# Altium PCB PCB2.PcbDoc (part 1 of 2)
Units mil, origin at the board's own origin, x right, y up, seen from the top; angles counter-clockwise.
Board outline 5560 x 2585 mil, 4 copper layers (L1, L2, L3, L4), stack 23.756 mil thick; 155 components, 55 nets, 355 pads, 375 vias.
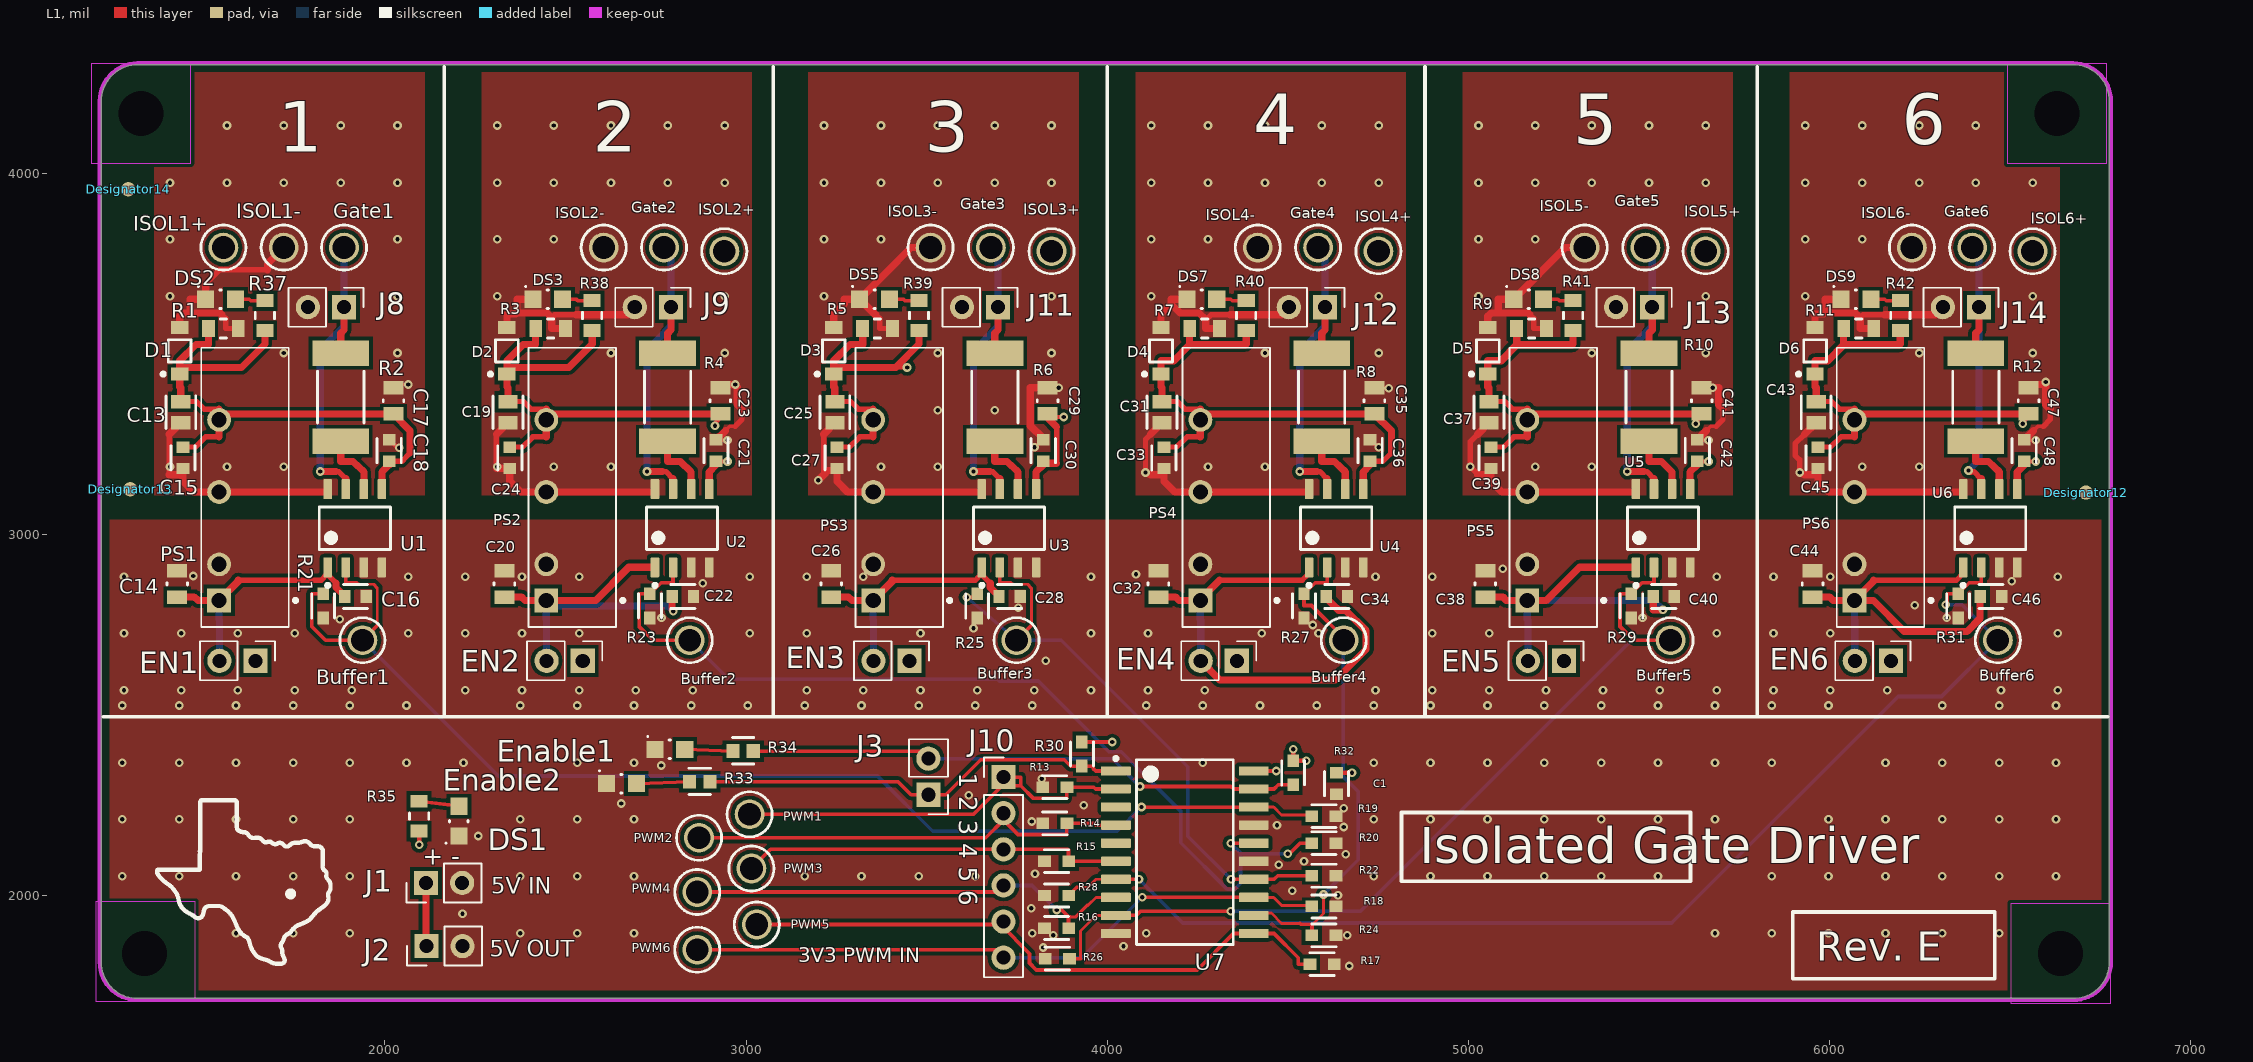
[diagram p0: L1 view]
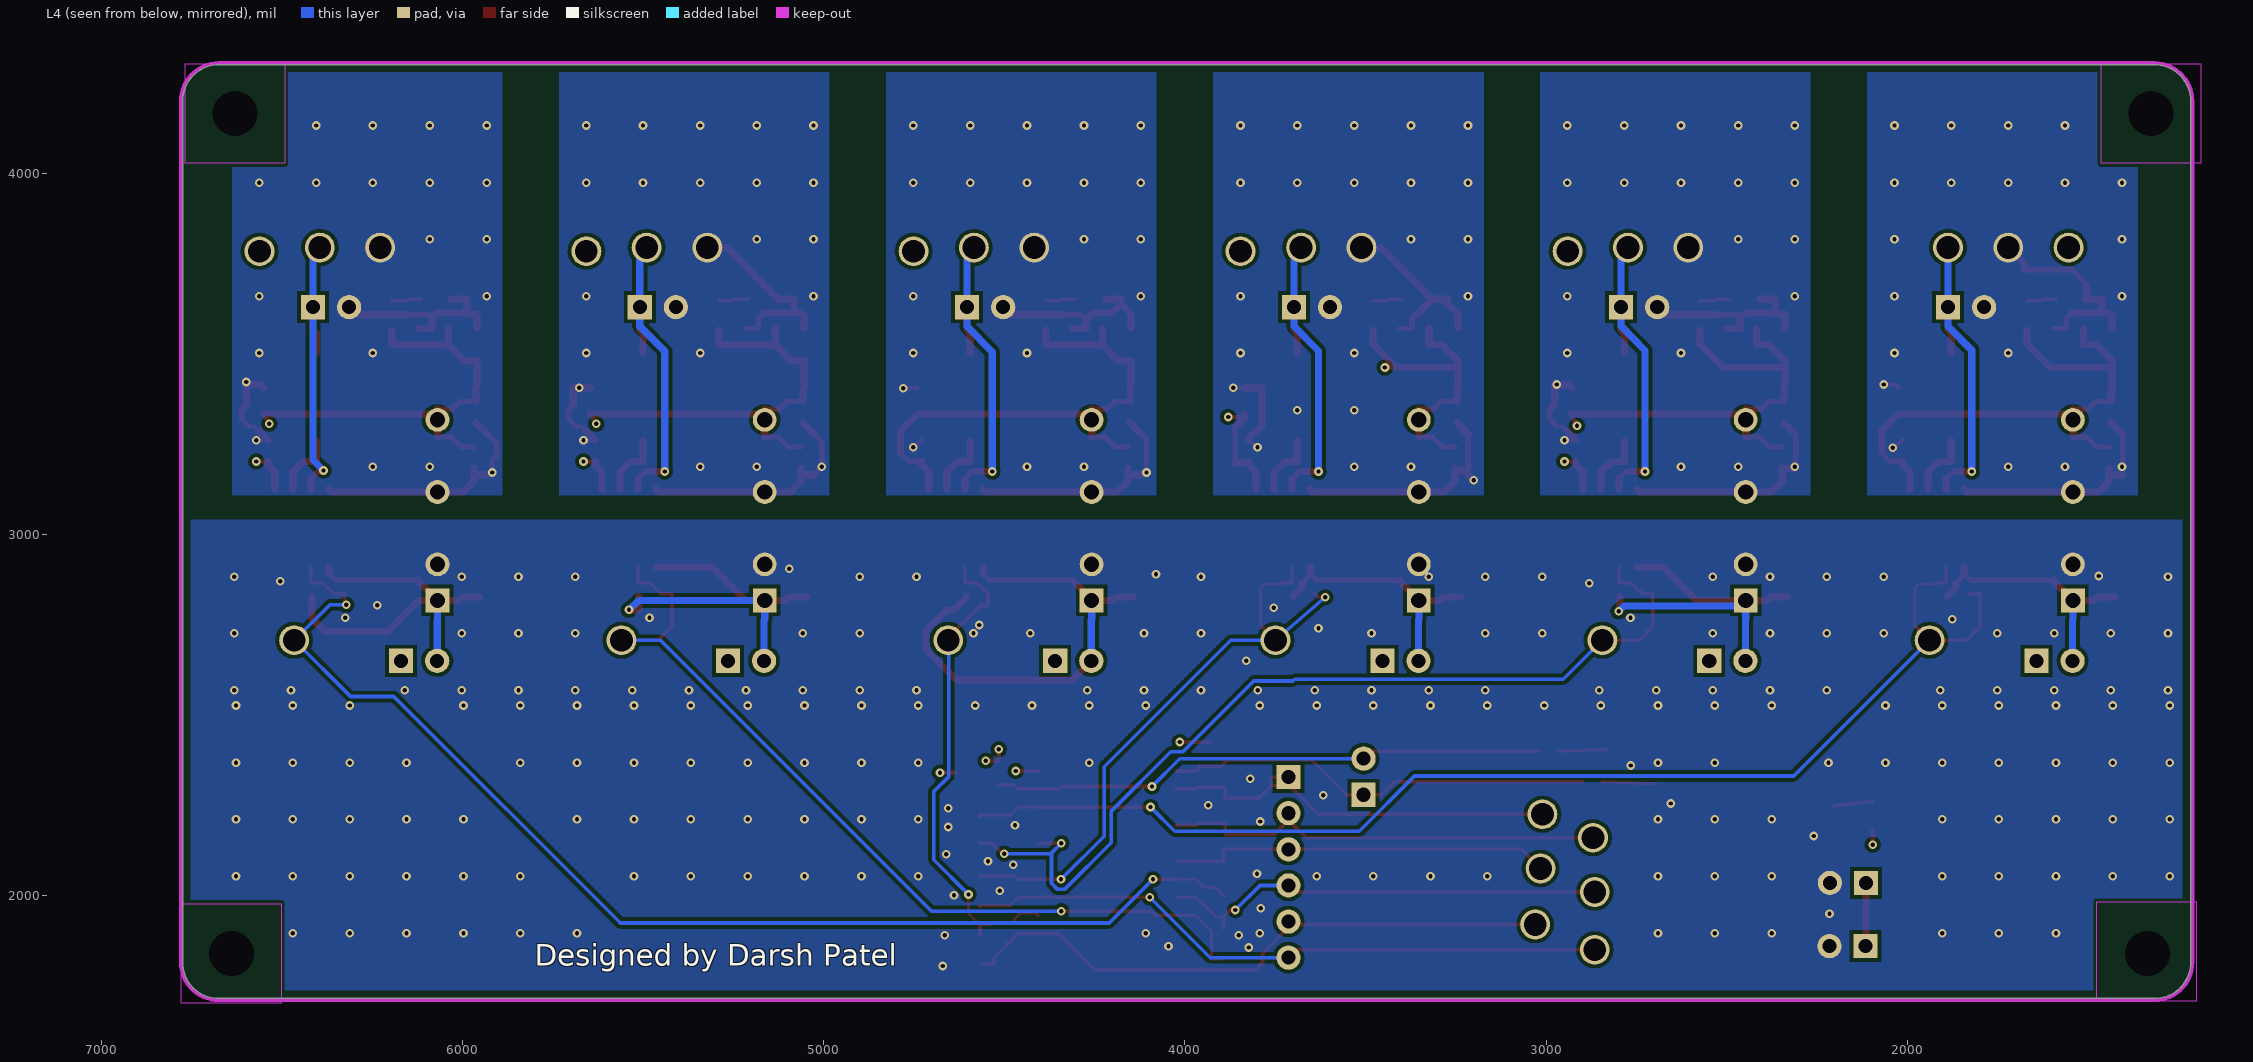
[diagram p1: L4 view, seen from below]
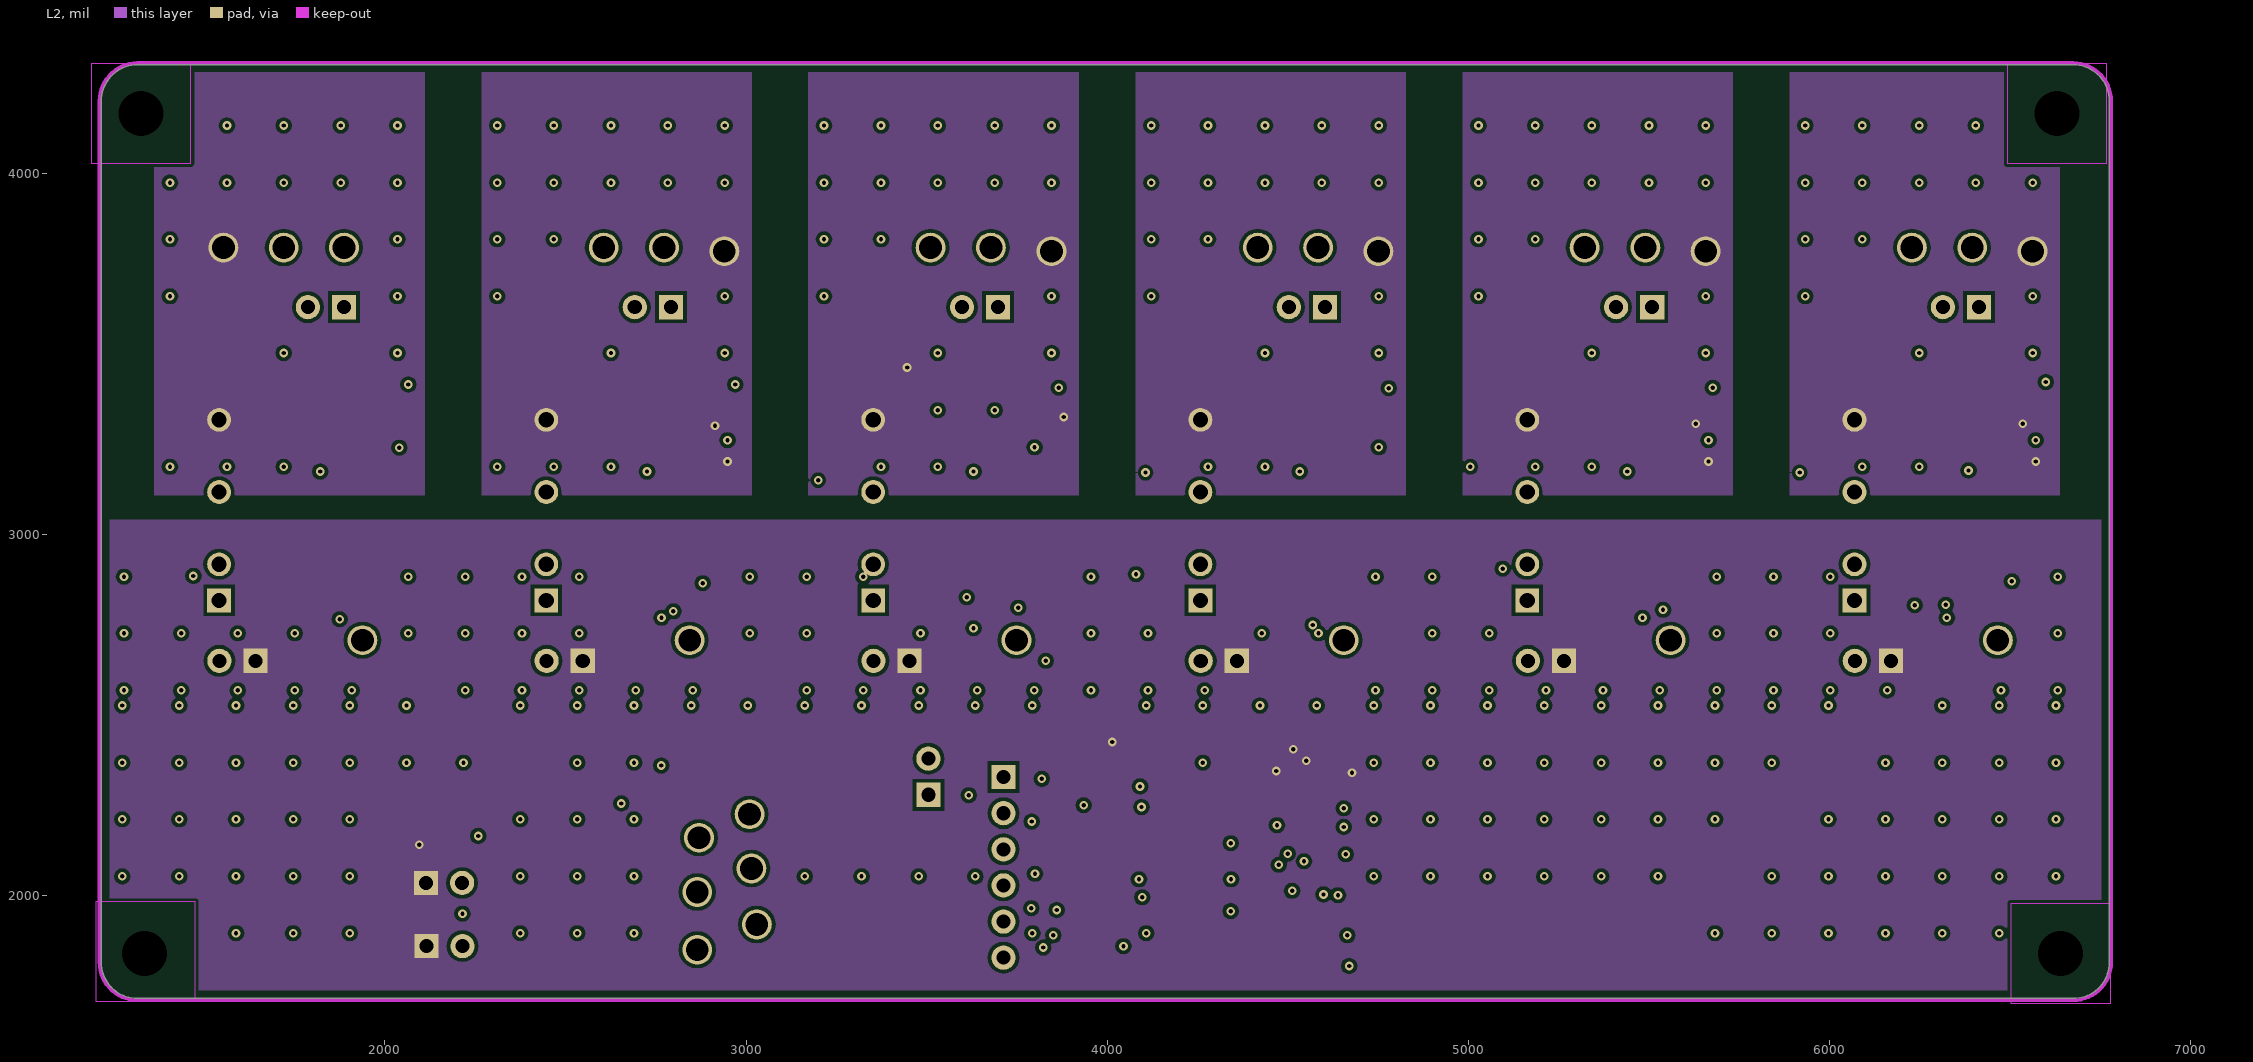
[diagram p2: L2]
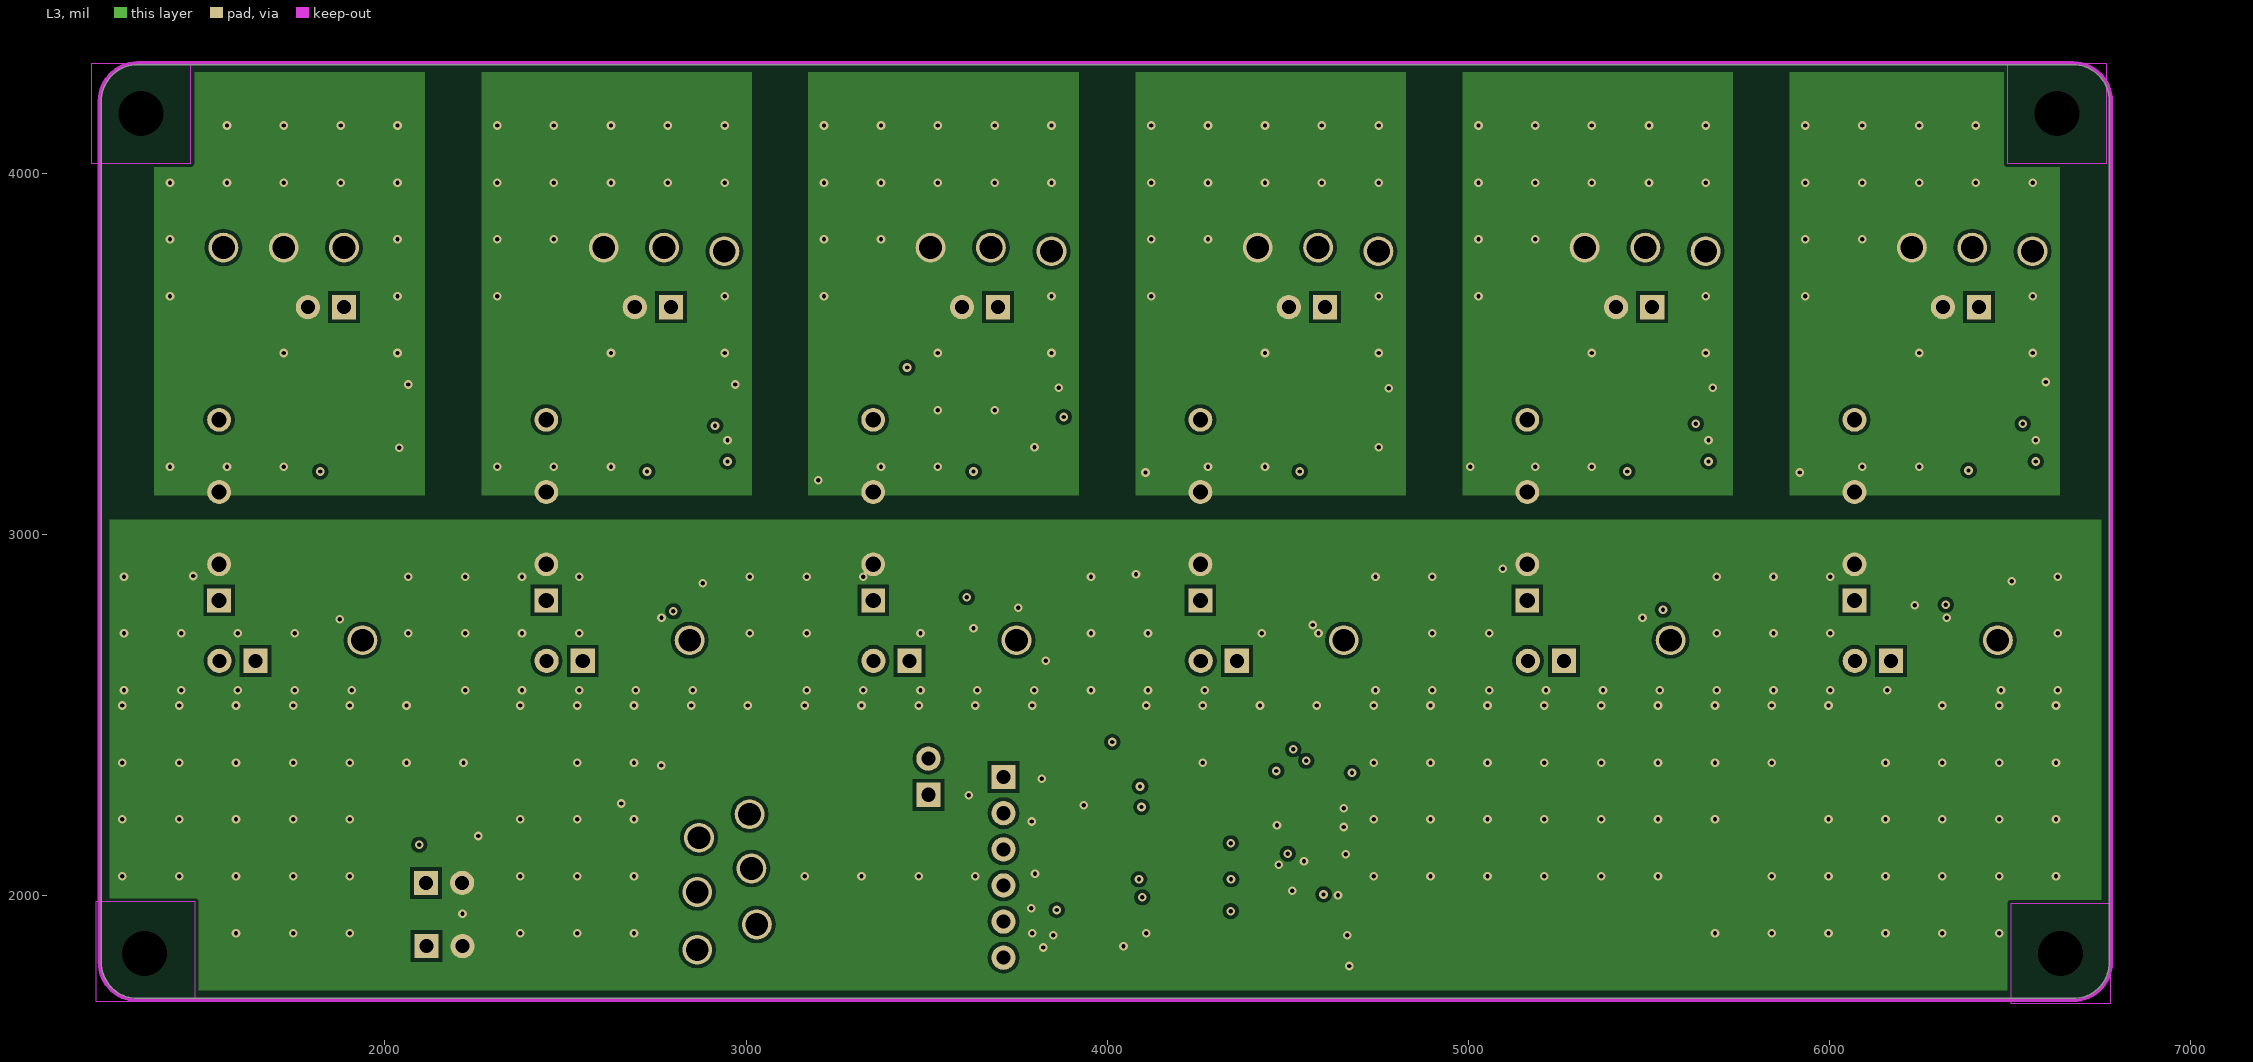
[diagram p3: L3]
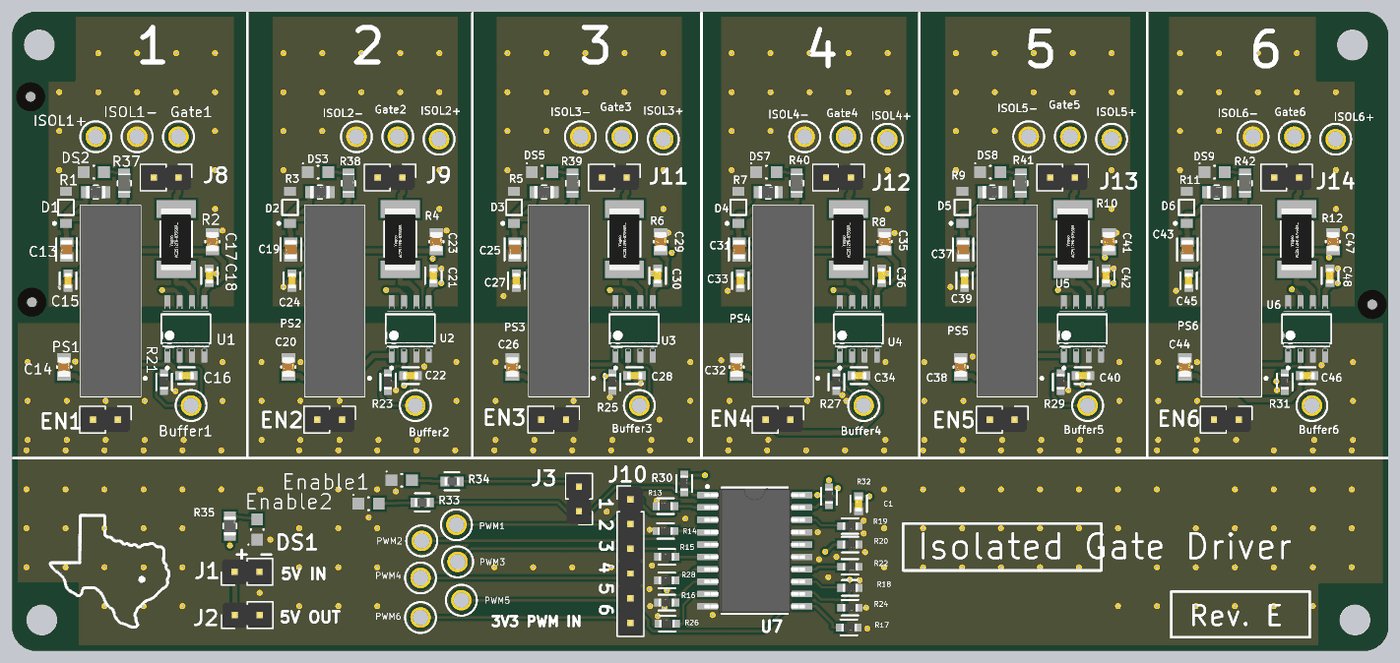
[diagram p4: 3D render of the assembled board from above, using the file's embedded part models]

## Layer stack, top to bottom
Top Solder: solder mask 0.4, Solder Resist, Dk 3.5
L1: signal copper 1.378
Dielectric 2: prepreg 2.8, PP-006, Dk 4.1
L2: signal copper 1.4
Dielectric 1: dielectric 12.6, FR-4, Dk 4.8
L3: signal copper 1.4
Dielectric 3: prepreg 2.8, PP-006, Dk 4.1
L4: signal copper 1.378
Bottom Solder: solder mask 0.4, Solder Resist, Dk 3.5

## Board outline
1315,1715 6675,1715 ccw(c6675,1815) 6775,1815 6775,4200 ccw(c6675,4200) 6675,4300 1315,4300 ccw(c1315,4200) 1215,4200 1215,1815 ccw(c1315,1815)

## Design rules (kind name [scope] priority, off if disabled: settings)
Clearance KiCad_Polygon_Clearance [IsPolygon Or InPolygon] p1: gap=10 ignorepadtopadclearanceinfootprint=FALSE
Clearance KiCad_Routing_Clearance [Not IsPolygon And Not InPolygon vs Not IsPolygon And Not InPolygon] p2: gap=7.87 ignorepadtopadclearanceinfootprint=FALSE // Copied KiCad proposal netclass clearance; pour clearance uses separate rule.
Clearance [All] p3: gap=10 ignorepadtopadclearanceinfootprint=FALSE except(5: THPad-THPad)
HoleSize MountingHoleSize [IsPad And (PadIsPlated = 'False')] p1: absolutevalues=TRUE maxlimit=125 minlimit=125 maxpercent=80.000 minpercent=20.000 // Existing four 3.175 mm unplated mounting holes.
HoleSize [IsVia Or (IsPad And (PadIsPlated = 'True'))] p2: absolutevalues=TRUE maxlimit=100 minlimit=1 maxpercent=80.000 minpercent=20.000 // Plated pad and via drills; 3.175 mm NPTH mounts have a separate exact-size rule.
PolygonConnect [All] p1: connectstyle=Direct reliefconductorwidth=10 reliefentries=4 polygonreliefangle="90 Angle" airgapwidth=10
RoutingVias [All] p1: holewidth=12 width=24 viastyle="Through Hole" minholewidth=12 minwidth=24 maxholewidth=12 maxwidth=24 // Matches copied KiCad 0.6 mm / 0.3 mm vias, rounded to 24 / 12 mil in transfer.
SolderMaskExpansion [Not IsVia] p1: expansion=0 istentingtop=FALSE
SolderMaskExpansion KiCad_Via_Mask [IsVia] p2: expansion=-13 istentingtop=FALSE // Copy KiCad both-side tenting: eliminate mask aperture on 24mil vias with radial contraction greater than the via radius.
SolderMaskExpansion SolderMaskExpansion_1 [All] p3: expansion=0 istentingtop=FALSE
SupplyNets "Schematic Supply Nets_1" [InNet('DGND')] p1: voltage=0.000
SupplyNets "Schematic Supply Nets" [InNet('5V')] p2: voltage=0.000
Width Width_2 [All] p1: maxlimit=30 minlimit=8 preferedwidth=10 minimp=50.000000 maximp=50.000000 favimp=50.000000 // Minimum matches KiCad 0.2mm routes after integer-mil transfer.
Width Width_1 [InNet('DGND')] p2: maxlimit=25 minlimit=10 preferedwidth=10 toplayer_minwidth=15 toplayer_prefwidth=20 midlayer1_maxwidth=10 midlayer2_maxwidth=10 bottomlayer_maxwidth=10 minimp=50.000000 maximp=50.000000 favimp=50.000000
Width [InNet('5V')] p3: maxlimit=20 minlimit=10 preferedwidth=10 toplayer_prefwidth=20 midlayer1_maxwidth=10 midlayer2_maxwidth=10 bottomlayer_maxwidth=10 minimp=50.000000 maximp=50.000000 favimp=50.000000
29 further rules are at their usual default settings.

## Components (designator, comment, footprint, x,y, rotation, side; value= is the part's Value field where it differs from the comment)
Buffer1 "5012" KSTN-5012_V 1938,2707 r0 top (schematic designator TP3)
Buffer2 "5012" KSTN-5012_V 2844,2707 r0 top (schematic designator TP4)
Buffer3 "5012" KSTN-5012_V 3749,2707 r0 top (schematic designator TP5)
Buffer4 "5012" KSTN-5012_V 4655,2707 r0 top (schematic designator TP6)
Buffer5 "5012" KSTN-5012_V 5560,2707 r0 top (schematic designator TP7)
Buffer6 "5012" KSTN-5012_V 6466,2707 r0 top (schematic designator TP8)
C1 "CC0603MRX7R8BB104" FP-CC0603-DA-MFG 4635,2310 r270 top value="100 nF"
C13 "C0805C475K3RACAUTO" FP-C0805C475K3RACAUTO-MFG 1435,3338 r270 top
C14 "CC0805KFX7R8BB105" FP-CC0805-0_85-MFG 1425,2863 r90 top value="1 uF"
C15 "CC0603MRX7R8BB104" FP-CC0603-DA-MFG 1441,3212 r270 top value="100 nF"
C16 "CC0603MRX7R8BB104" FP-CC0603-DA-MFG 1919,2828 r0 top value="100 nF"
C17 "CC0805KFX7R8BB105" FP-CC0805-0_85-MFG 2024,3370 r90 top value="1 uF"
C18 "CC0603MRX7R8BB104" FP-CC0603-DA-MFG 2012,3232 r90 top value="100 nF"
C19 "C0805C475K3RACAUTO" FP-C0805C475K3RACAUTO-MFG 2341,3338 r270 top
C20 "CC0805KFX7R8BB105" FP-CC0805-0_85-MFG 2331,2863 r90 top value="1 uF"
C21 "CC0603MRX7R8BB104" FP-CC0603-DA-MFG 2917,3232 r90 top value="100 nF"
C22 "CC0603MRX7R8BB104" FP-CC0603-DA-MFG 2825,2828 r0 top value="100 nF"
C23 "CC0805KFX7R8BB105" FP-CC0805-0_85-MFG 2929,3370 r90 top value="1 uF"
C24 "CC0603MRX7R8BB104" FP-CC0603-DA-MFG 2346,3212 r270 top value="100 nF"
C25 "C0805C475K3RACAUTO" FP-C0805C475K3RACAUTO-MFG 3246,3338 r270 top
C26 "CC0805KFX7R8BB105" FP-CC0805-0_85-MFG 3236,2863 r90 top value="1 uF"
C27 "CC0603MRX7R8BB104" FP-CC0603-DA-MFG 3252,3212 r270 top value="100 nF"
C28 "CC0603MRX7R8BB104" FP-CC0603-DA-MFG 3730,2828 r0 top value="100 nF"
C29 "CC0805KFX7R8BB105" FP-CC0805-0_85-MFG 3835,3370 r90 top value="1 uF"
C30 "CC0603MRX7R8BB104" FP-CC0603-DA-MFG 3823,3232 r90 top value="100 nF"
C31 "C0805C475K3RACAUTO" FP-C0805C475K3RACAUTO-MFG 4152,3338 r270 top
C32 "CC0805KFX7R8BB105" FP-CC0805-0_85-MFG 4142,2863 r90 top value="1 uF"
C33 "CC0603MRX7R8BB104" FP-CC0603-DA-MFG 4157,3212 r270 top value="100 nF"
C34 "CC0603MRX7R8BB104" FP-CC0603-DA-MFG 4636,2828 r0 top value="100 nF"
C35 "CC0805KFX7R8BB105" FP-CC0805-0_85-MFG 4740,3370 r90 top value="1 uF"
C36 "CC0603MRX7R8BB104" FP-CC0603-DA-MFG 4728,3232 r90 top value="100 nF"
C37 "C0805C475K3RACAUTO" FP-C0805C475K3RACAUTO-MFG 5057,3338 r270 top
C38 "CC0805KFX7R8BB105" FP-CC0805-0_85-MFG 5047,2863 r90 top value="1 uF"
C39 "CC0603MRX7R8BB104" FP-CC0603-DA-MFG 5063,3212 r270 top value="100 nF"
C40 "CC0603MRX7R8BB104" FP-CC0603-DA-MFG 5541,2828 r0 top value="100 nF"
C41 "CC0805KFX7R8BB105" FP-CC0805-0_85-MFG 5646,3370 r90 top value="1 uF"
C42 "CC0603MRX7R8BB104" FP-CC0603-DA-MFG 5634,3232 r90 top value="100 nF"
C43 "C0805C475K3RACAUTO" FP-C0805C475K3RACAUTO-MFG 5963,3338 r270 top
C44 "CC0805KFX7R8BB105" FP-CC0805-0_85-MFG 5953,2863 r90 top value="1 uF"
C45 "CC0603MRX7R8BB104" FP-CC0603-DA-MFG 5968,3212 r270 top value="100 nF"
C46 "CC0603MRX7R8BB104" FP-CC0603-DA-MFG 6447,2828 r0 top value="100 nF"
C47 "CC0805KFX7R8BB105" FP-CC0805-0_85-MFG 6551,3370 r90 top value="1 uF"
C48 "CC0603MRX7R8BB104" FP-CC0603-DA-MFG 6539,3232 r90 top value="100 nF"
D1 "MMSZ5245CT1G" ONSC-SOD-123-2-425-04_V 1432,3508 r90 top
D2 "MMSZ5245CT1G" ONSC-SOD-123-2-425-04_V 2338,3508 r90 top
D3 "MMSZ5245CT1G" ONSC-SOD-123-2-425-04_V 3243,3508 r90 top
D4 "MMSZ5245CT1G" ONSC-SOD-123-2-425-04_V 4149,3508 r90 top
D5 "MMSZ5245CT1G" ONSC-SOD-123-2-425-04_V 5054,3508 r90 top
D6 "MMSZ5245CT1G" ONSC-SOD-123-2-425-04_V 5960,3508 r90 top
Designator12 "Comment" fiducial 6709.81,3115.63 r180 top
Designator13 "Comment" fiducial 1295,3125 r180 top
Designator14 "Comment" fiducial 1289.81,3955.63 r180 top
DS1 "LTST-C170KGKT" LTST-LTST-C170KGKT-2_V 2205,2206 r90 top
DS2 "LTST-C170KGKT" LTST-LTST-C170KGKT-2_V 1545,3651 r0 top
DS3 "LTST-C170KGKT" LTST-LTST-C170KGKT-2_V 2451,3651 r0 top
DS5 "LTST-C170KGKT" LTST-LTST-C170KGKT-2_V 3356,3651 r0 top
DS7 "LTST-C170KGKT" LTST-LTST-C170KGKT-2_V 4262,3651 r0 top
DS8 "LTST-C170KGKT" LTST-LTST-C170KGKT-2_V 5167,3651 r0 top
DS9 "LTST-C170KGKT" LTST-LTST-C170KGKT-2_V 6073,3651 r0 top
EN1 "TMM-102-03-F-S" PinHeader_1x02_P2.54mm_Vertical 1642,2650 r270 top
EN2 "TMM-102-03-F-S" PinHeader_1x02_P2.54mm_Vertical 2548,2650 r270 top
EN3 "TMM-102-03-F-S" PinHeader_1x02_P2.54mm_Vertical 3453,2650 r270 top
EN4 "TMM-102-03-F-S" PinHeader_1x02_P2.54mm_Vertical 4359,2650 r270 top
EN5 "TMM-102-03-F-S" PinHeader_1x02_P2.54mm_Vertical 5265,2650 r270 top
EN6 "TMM-102-03-F-S" PinHeader_1x02_P2.54mm_Vertical 6170,2650 r270 top
Enable1 "LTST-C170KGKT" LTST-LTST-C170KGKT-2_V 2789,2405 r0 top (schematic designator DS4)
Enable2 "LTST-C170KGKT" LTST-LTST-C170KGKT-2_V 2655,2310 r0 top (schematic designator DS6)
Gate1 "5012" KSTN-5012_V 1720,3794 r0 top (schematic designator TP11)
Gate2 "5012" KSTN-5012_V 2773,3794 r0 top (schematic designator TP13)
Gate3 "5012" KSTN-5012_V 3678,3794 r0 top (schematic designator TP16)
Gate4 "5012" KSTN-5012_V 4584,3794 r0 top (schematic designator TP21)
Gate5 "5012" KSTN-5012_V 5490,3794 r0 top (schematic designator TP27)
Gate6 "5012" KSTN-5012_V 6395,3794 r0 top (schematic designator TP31)
ISOL1+ "5012" KSTN-5012_V 1553,3794 r0 top (schematic designator TP9)
ISOL1- "5012" KSTN-5012_V 1887,3794 r0 top (schematic designator TP10)
ISOL2+ "5012" KSTN-5012_V 2940,3784 r0 top (schematic designator TP12)
ISOL2- "5012" KSTN-5012_V 2606,3794 r0 top (schematic designator TP14)
ISOL3+ "5012" KSTN-5012_V 3846,3784 r0 top (schematic designator TP15)
ISOL3- "5012" KSTN-5012_V 3511,3794 r0 top (schematic designator TP17)
ISOL4+ "5012" KSTN-5012_V 4751,3784 r0 top (schematic designator TP19)
ISOL4- "5012" KSTN-5012_V 4417,3794 r0 top (schematic designator TP22)
ISOL5+ "5012" KSTN-5012_V 5657,3784 r0 top (schematic designator TP25)
ISOL5- "5012" KSTN-5012_V 5322,3794 r0 top (schematic designator TP28)
ISOL6+ "5012" KSTN-5012_V 6562,3784 r0 top (schematic designator TP30)
ISOL6- "5012" KSTN-5012_V 6228,3794 r0 top (schematic designator TP32)
J1 "TMM-102-03-F-S" PinHeader_1x02_P2.54mm_Vertical 2114,2035 r90 top
J2 "TMM-102-03-F-S" PinHeader_1x02_P2.54mm_Vertical 2115,1860 r90 top
J3 "TMM-102-03-F-S" PinHeader_1x02_P2.54mm_Vertical 3505,2279 r180 top
J8 "TMM-102-03-F-S" PinHeader_1x02_P2.54mm_Vertical 1887,3629 r270 top
J9 "TMM-102-03-F-S" PinHeader_1x02_P2.54mm_Vertical 2792,3629 r270 top
J10 "GRPB061VWVN-RC" PinHeader_1x06_P2.54mm_Vertical 3713,2328 r0 top
J11 "TMM-102-03-F-S" PinHeader_1x02_P2.54mm_Vertical 3698,3629 r270 top
J12 "TMM-102-03-F-S" PinHeader_1x02_P2.54mm_Vertical 4603,3629 r270 top
J13 "TMM-102-03-F-S" PinHeader_1x02_P2.54mm_Vertical 5509,3629 r270 top
J14 "TMM-102-03-F-S" PinHeader_1x02_P2.54mm_Vertical 6414,3629 r270 top
PS1 "MER1S0515SC" MER1S0515SC_MFG 1613,3130 r90 top
PS2 "MER1S0515SC" MER1S0515SC_MFG 2519,3130 r90 top
PS3 "MER1S0515SC" MER1S0515SC_MFG 3424,3130 r90 top
PS4 "MER1S0515SC" MER1S0515SC_MFG 4330,3130 r90 top
PS5 "MER1S0515SC" MER1S0515SC_MFG 5235,3130 r90 top
PS6 "MER1S0515SC" MER1S0515SC_MFG 6141,3130 r90 top
PWM1 "5012" KSTN-5012_V 3010,2225 r0 top (schematic designator TP18)
PWM2 "5012" KSTN-5012_V 2870,2160 r0 top (schematic designator TP20)
PWM3 "5012" KSTN-5012_V 3015,2075 r0 top (schematic designator TP23)
PWM4 "5012" KSTN-5012_V 2865,2010 r0 top (schematic designator TP24)
PWM5 "5012" KSTN-5012_V 3030,1920 r0 top (schematic designator TP26)
PWM6 "5012" KSTN-5012_V 2865,1850 r180 top (schematic designator TP29)
R1 "RT0805DRD0775RL" FP-RT0805-MFG 1553,3570 r0 top value=75Ω
R2 "AC2512JK-0739KL" FP-AC2512-MFG 1878,3380 r90 top value=39KΩ
R3 "RT0805DRD0775RL" FP-RT0805-MFG 2459,3570 r0 top value=75Ω
R4 "AC2512JK-0739KL" FP-AC2512-MFG 2783,3380 r90 top value=39KΩ
R5 "RT0805DRD0775RL" FP-RT0805-MFG 3364,3570 r0 top value=75Ω
R6 "AC2512JK-0739KL" FP-AC2512-MFG 3689,3380 r90 top value=39KΩ
R7 "RT0805DRD0775RL" FP-RT0805-MFG 4270,3570 r0 top value=75Ω
R8 "AC2512JK-0739KL" FP-AC2512-MFG 4594,3380 r90 top value=39KΩ
R9 "RT0805DRD0775RL" FP-RT0805-MFG 5175,3570 r0 top value=75Ω
R10 "AC2512JK-0739KL" FP-AC2512-MFG 5500,3380 r90 top value=39KΩ
R11 "RT0805DRD0775RL" FP-RT0805-MFG 6081,3570 r0 top value=75Ω
R12 "AC2512JK-0739KL" FP-AC2512-MFG 6405,3380 r90 top value=39KΩ
R13 "RT0603CRD0710KL" FP-RT0603-MFG 3855,2300 r180 top value=10KΩ
R14 "RT0603CRD0710KL" FP-RT0603-MFG 3855,2200 r180 top value=10KΩ
R15 "RT0603CRD0710KL" FP-RT0603-MFG 3860,2095 r180 top value=10KΩ
R16 "RT0603CRD0710KL" FP-RT0603-MFG 3860,1910 r180 top value=10KΩ
R17 "RT0603CRD0710KL" FP-RT0603-MFG 4595,1810 r0 top value=10KΩ
R18 "RT0603CRD0710KL" FP-RT0603-MFG 4600,1970 r0 top value=10KΩ
R19 "RT0603CRD0710KL" FP-RT0603-MFG 4600,2220 r0 top value=10KΩ
R20 "RT0603CRD0710KL" FP-RT0603-MFG 4600,2145 r0 top value=10KΩ
R21 "RT0603CRD0710KL" FP-RT0603-MFG 1829,2802 r90 top value=10KΩ
R22 "RT0603CRD0710KL" FP-RT0603-MFG 4600,2055 r0 top value=10KΩ
R23 "RT0603CRD0710KL" FP-RT0603-MFG 2734,2802 r90 top value=10KΩ
R24 "RT0603CRD0710KL" FP-RT0603-MFG 4600,1890 r0 top value=10KΩ
R25 "RT0603CRD0710KL" FP-RT0603-MFG 3640,2802 r90 top value=10KΩ
R26 "RT0603CRD0710KL" FP-RT0603-MFG 3862,1825 r180 top value=10KΩ
R27 "RT0603CRD0710KL" FP-RT0603-MFG 4545,2802 r90 top value=10KΩ
R28 "RT0603CRD0710KL" FP-RT0603-MFG 3860,2000 r180 top value=10KΩ
R29 "RT0603CRD0710KL" FP-RT0603-MFG 5451,2802 r90 top value=10KΩ
R30 "RT0603CRD0710KL" FP-RT0603-MFG 3930,2392 r90 top value=10KΩ
R31 "RT0603CRD0710KL" FP-RT0603-MFG 6356,2802 r90 top value=10KΩ
R32 "RT0603CRD0710KL" FP-RT0603-MFG 4515,2340 r90 top value=10KΩ
R33 "CRCW0603220KFKEA" FP-CRCW0603-e3-IPC_B 2872,2315 r180 top
R34 "CRCW0603220KFKEA" FP-CRCW0603-e3-IPC_B 2992,2400 r180 top
R35 "AF0805FR-07150RL" FP-AF0805-MFG 2095,2220 r90 top
R37 "AC0805JR-07680RL" FP-AC0805-MFG 1668,3606 r90 top value=680Ω
R38 "AC0805JR-07680RL" FP-AC0805-MFG 2574,3606 r90 top value=680Ω
R39 "AC0805JR-07680RL" FP-AC0805-MFG 3479,3606 r90 top value=680Ω
R40 "AC0805JR-07680RL" FP-AC0805-MFG 4385,3606 r90 top value=680Ω
R41 "AC0805JR-07680RL" FP-AC0805-MFG 5290,3606 r90 top value=680Ω
R42 "AC0805JR-07680RL" FP-AC0805-MFG 6196,3606 r90 top value=680Ω
U1 "UCC5310MCDR" FP-D0008B-MFG 1917,3017 r90 top
U2 "UCC5310MCDR" FP-D0008B-MFG 2823,3017 r90 top
U3 "UCC5310MCDR" FP-D0008B-MFG 3728,3017 r90 top
U4 "UCC5310MCDR" FP-D0008B-MFG 4634,3017 r90 top
U5 "UCC5310MCDR" FP-D0008B-MFG 5539,3017 r90 top
U6 "UCC5310MCDR" FP-D0008B-MFG 6445,3017 r90 top
U7 "SN74AHCT244QDWR" DW0020A_M 4215,2120 r0 top

## Footprints (in the part's own frame and the unit in brackets; to place one, negate y for a bottom-side part, rotate by r counter-clockwise, add the part's x,y. Pads: shape width x height; smd on the part's side, far side on the other; paste and mask are expansions set on the pad)
DW0020A_M [mm] "SOIC, 20-Leads, Body 13x7.6mm, Pitch 1.27mm, IPC Low Density"
  rrect15% 2.1x0.65 smd: 1(-4.85,5.715) 2(-4.85,4.445) 3(-4.85,3.175) 4(-4.85,1.905) 5(-4.85,0.635) 6(-4.85,-0.635) 7(-4.85,-1.905) 8(-4.85,-3.175) 9(-4.85,-4.445) 10(-4.85,-5.715) 11(4.85,-5.715) 12(4.85,-4.445) 13(4.85,-3.175) 14(4.85,-1.905) 15(4.85,-0.635) 16(4.85,0.635) 17(4.85,1.905) 18(4.85,3.175) 19(4.85,4.445) 20(4.85,5.715)
  silkscreen extent -4.97,-6.5 3.4,6.71, body extent -5.16,-6.4 5.16,6.4, height 2.52
fiducial [mm]
  round 1 smd mask+1: 1(0,0)
  oval 0x6.096 smd: 15(-0.005,0.016)
FP-AC0805-MFG [mm]
  rect 0.9x1.2 smd paste+0 mask+0: 1(-1.05,0) 2(1.05,0)
  silkscreen extent -0.23,-0.67 0.23,0.67, body extent -1.6,-0.77 1.6,0.77, height 0.25
FP-AC2512-MFG [mm]
  rect 1.8x4 smd paste+0 mask+0: 1(-3.1,0) 2(3.1,0)
  silkscreen extent -1.82,-1.62 1.82,1.62, body extent -4.1,-2.1 4.1,2.1, height 0.25
FP-AF0805-MFG [mm]
  rect 0.9x1.2 smd paste+0 mask+0: 1(-1.05,0) 2(1.05,0)
  silkscreen extent -0.23,-0.67 0.23,0.67, body extent -1.6,-0.77 1.6,0.77, height 0.25
FP-C0805C475K3RACAUTO-MFG [mm]
  rect 0.95x1.35 smd paste+0 mask+0: 1(-0.75,0) 2(0.75,0)
  silkscreen extent -1.15,-1.05 1.15,1.05, body extent -1.4,-0.85 1.4,0.85, height 0.25
FP-CC0603-DA-MFG [mm]
  rect 0.8x0.9 smd paste+0 mask+0: 1(-0.75,0) 2(0.75,0)
  silkscreen extent -0.85,-0.85 0.85,0.85, body extent -1.35,-0.75 1.35,0.75, height 0.25
FP-CC0805-0_85-MFG [mm]
  rect 0.95x1.4 smd paste+0 mask+0: 1(-0.925,0) 2(0.925,0)
  silkscreen extent -0.07,-0.73 0.07,0.73, body extent -1.6,-1.05 1.6,1.05, height 0.25
FP-CRCW0603-e3-IPC_B [mil]
  rect 36.81x37.88 smd paste+0 mask+0: 1(-28.17,0) 2(28.17,0)
  silkscreen extent -30,-37 30,35, body extent -56,-29 56,29, height 10
FP-D0008B-MFG [mm]
  rrect17% 1.4x0.6 smd paste+0 mask+0: 1(-2.75,1.905) 2(-2.75,0.635) 3(-2.75,-0.635) 4(-2.75,-1.905) 5(2.75,-1.905) 6(2.75,-0.635) 7(2.75,0.635) 8(2.75,1.905)
  silkscreen extent -4.14,-2.5 1.5,2.5, body extent -3.55,-2.75 3.55,2.75, height 0.25
FP-RT0603-MFG [mm]
  rect 0.9x0.8 smd paste+0 mask+0: 1(-0.85,0) 2(0.85,0)
  silkscreen extent -0.85,-0.81 0.86,0.8, body extent -1.4,-0.55 1.4,0.55, height 0.25
FP-RT0805-MFG [mm]
  rect 0.9x1.2 smd paste+0 mask+0: 1(-1.05,0) 2(1.05,0)
  silkscreen extent -0.22,-0.67 0.22,0.67, body extent -1.6,-0.77 1.6,0.77, height 0.25
KSTN-5012_V [mm] "Test Point, Dia 3.17mm"
  round 2.1 hole 1.6: 1(0,0)
  silkscreen extent -1.59,-1.58 1.59,1.58, body extent -1.59,-1.59 1.59,1.59, height 8.13
LTST-LTST-C170KGKT-2_V [mm] "SMD, 2-Leads, Body 2.00x1.25mm"
  rect 1.2x1.2 smd: 1(-1.05,0) 2(1.05,0)
  silkscreen extent -1.6,-0.65 0.05,0.95, body extent -1,-0.63 1,0.63, height 1.1
MER1S0515SC_MFG [mm] "Recommended Land Pattern"
  rect 1.675x1.675 hole 1.075: 1(-7.945,1.825)
  round 1.675 hole 1.075: 2(-5.405,1.825) 4(-0.325,1.825) 6(4.755,1.825)
  silkscreen extent -9.82,-3.68 9.83,3.07, body extent -9.82,-3.08 9.82,3.08, height 10.15
ONSC-SOD-123-2-425-04_V [mm] "SOD, 2-Leads, Body 2.69x1.6mm"
  rect 0.91x1.22 smd: 1(-1.635,0) 2(1.635,0)
  silkscreen extent -1.76,-0.8 0.78,1.28, body extent -1.35,-0.8 1.35,0.8, height 1.35
PinHeader_1x02_P2.54mm_Vertical [mil] "PinHeader_1x02_P2.54mm_Vertical"
  rect 67x67 hole 39: 1(0,0)
  round 67 hole 39: 2(0,-100)
  silkscreen extent -54,-154 54,54, body extent -50,-150 50,50, height 336
PinHeader_1x06_P2.54mm_Vertical [mil] "PinHeader_1x06_P2.54mm_Vertical"
  rect 67x67 hole 39: 1(0,0)
  round 67 hole 39: 2(0,-100) 3(0,-200) 4(0,-300) 5(0,-400) 6(0,-500)
  silkscreen extent -54,-554 54,54, body extent -50,-550 50,50, height 336

## Part data
Buffer1 Buffer2 Buffer3 Buffer4 Buffer5 Buffer6 Gate1 Gate2 Gate3 Gate4 Gate5 Gate6 ISOL1+ ISOL1- ISOL2+ ISOL2- ISOL3+ ISOL3- ISOL4+ ISOL4- ISOL5+ ISOL5- ISOL6+ ISOL6- PWM1 PWM2 PWM3 PWM4 PWM5 PWM6: library part CMP-1672-00004-4, "Test Point, White, Through Hole, RoHS, Bulk", Colour=White, Manufacturer=Keystone, Package Quantity=100, ComponentLink1Description="Manufacturer URL", ComponentLink1URL=http://www.keyelco.com/, ComponentLink2Description=Datasheet, ComponentLink2URL=http://www.keyelco.com/product-pdf.cfm?p=1321, Contact Material=Bronze, Contact Plating=Silver, DatasheetVersion="Rev. F, 12/2013", Height="8.12 mm", Length="11.3 mm", Mount="Through Hole", Mounting Technology="Through Hole", PackageDescription="1-Pin Through Hole Device, Dia 3.17 mm", PackageReference=5012, Packaging=Bulk, Pins=1, REACH SVHC="No SVHC", RoHSCompliant=true
C1 C15 C16 C18 C21 C22 C24 C27 C28 C30 C33 C34 C36 C39 C40 C42 C45 C46 C48: library part CMP-03422-001021-1, "CAP CER 0.1UF 25V X7R 0603", Capacitance="100 nF", Manufacturer=YAGEO, Package=CC0603-DA, Temperature="-55°C to +125°C", Temperature Characteristic=X7R, Temperature Coefficient=15%, Temperature Range High=+125°C, Temperature Range Low=-55°C, Tolerance=0.2, Voltage="25 V", Automotive=No, Category=Cap, ComponentLink2Description=Datasheet, ComponentLink2URL=http://www.yageo.com/documents/recent/UPY-GPHC_X7R_6.3V-to-50V_18.pdf, Device Class L1="Passive Components", Device Class L2=Capacitors, Device Class L3="Ceramic Capacitors", Digikey Description="CAP CER 0.1UF 25V X7R 0603", Footprint Url=http://www.yageo.com/exep/pages/download/literatures/UPY-C_GEN_24.pdf, Height=0.9mm, Lead Free=Yes, Manufacturer Part Number=CC0603MRX7R8BB104, Material=Ceramic, Mouser Description="Multilayer Ceramic Capacitors MLCC - SMD/SMT 100nF 25V X7R 20%", Octopart=https://octopart.com/cc0603mrx7r8bb104-yageo-12817663, RoHS=TRUE, Voltage Rating="25 V"
C13 C19 C25 C31 C37 C43: library part CMP-03020-034682-1, "CAP CER 0805 4.7UF 25V X7R  10%", RoHS Compliant=Yes
C14 C17 C20 C23 C26 C29 C32 C35 C38 C41 C44 C47: library part CMP-03422-000373-1, "CC0805 1 uF X7R 10.00% 25 V", Capacitance="1 uF", Manufacturer=Yageo, Package=CC0805-0.85, Temperature="-30°C to +85°C", Temperature Characteristic=X7R, Temperature Range High=+85°C, Temperature Range Low=-30°C, Tolerance=0.1, Voltage Rating="25 V", Automotive=No, Category=Cap, ComponentLink2Description=Datasheet, ComponentLink2URL=http://www.yageo.com/documents/recent/UPY-GPHC_Y5V_6.3V-to-50V_8.pdf, Device Class L1="Passive Components", Device Class L2=Capacitors, Device Class L3="Ceramic Capacitors", Footprint Url=http://www.yageo.com/exep/pages/download/literatures/UPY-C_GEN_24.pdf, Height=0.95mm, Ipc Land Pattern Name=CAPC200125X85, Lead Free=Yes, Manufacturer Part Number=CC0805KFX7R8BB105, Material=Ceramic, Mouser Description="CC Series 0805 1 uF 25 V ±10% Tolerance X7R Multilayer Ceramic Capacitor", Octopart=https://octopart.com/cc0805kfx7r8bb105-yageo-33242303, RoHS=TRUE
D1 D2 D3 D4 D5 D6: library part CMP-1060-00534-1, "Zener Voltage Regulator, 500 mW, 2-Pin SOD-123, Pb-Free, Tape and Reel", Manufacturer="On Semiconductor", ComponentLink1Description="Manufacturer URL", ComponentLink1URL=http://www.onsemi.com/, ComponentLink2Description=Datasheet, ComponentLink2URL=http://www.onsemi.com/pub_link/Collateral/MMSZ5221BT1-D.PDF, ComponentLink3Description="Package Specification", ComponentLink3URL=http://www.onsemi.com/pub_link/Collateral/425-04.PDF, DatasheetVersion="Rev. 12", Mounting Technology="Surface Mount", P Max (W)=0.5, PackageDescription="2-Pin SOD, Body 1.6 x 2.69 mm", PackageReference=SOD-123-2-425-04, PackageVersion="Rev. G, 10/2009", Packing="Tape and Reel", PartNumber=MMSZ5245CT1G, RoHS=Pb-Free, VZ Typ (V)=15
DS1 DS2 DS3 DS5 DS7 DS8 DS9 Enable1 Enable2: library part CMP-2000-06620-1, "Ultra Bright AlInGaP Chip LED, 75 mW, -55 to 85 degC, 2-Pin SMD (0805), RoHS, Tape and Reel", Emitting Color=YellowGreen, Forward Current=30mA, Forward Voltage=2.4V, Manufacturer=Lite-On, Operating Temp Range=-55Cto85C, Operating Temperature Classification=Industrial, Package Description="2-Pin Surface Mounted Device, Body 2 x 1.25 mm", Package Reference=LTST-C170KGKT-2, Package Type=ChipLed, Power Dissipation=75W, Power Dissipation Max=75mW, Reverse Voltage=5V, Test Current (It)=20mA, Chip Material=AlGaInP, Datasheet URL=http://optoelectronics.liteon.com/upload/download/DS22-2000-073/S_110_LTST-C170KGKT.pdf, Datasheet Version="Rev. G, 06/2005", DELETED=Compliant, Dominant Wave Length=571nm, Forward Current Max=30mA, High Brightness=Yes, Lens Dimensions=1.4x1.25x0.6mm, Lum Intensity=35mcd, Luminous Intensity=35mcd, Main Category=ChipLED, Manufacturer URL=http://www.us.liteon.com/, Mounting=SurfaceMount, Mounting Technology=SurfaceMount, Number of  Elements=1, Packaging=TapeandReel, Peak Wavelength=574nm, Pin Count=2, Product Depth (mm)=1.25mm, Product Height (mm)=1.1mm, Product Length (mm)=2mm, Rad Hardened=No, Shape Type=Rectangular, Type=Uni-Color, Viewing Angle=130deg
EN1 EN2 EN3 EN4 EN5 EN6 J1 J2 J3 J8 J9 J11 J12 J13 J14: library part CMP-02766-001614-1, "CONN HEADER VERT 2POS 2MM", Contact Plating=Gold, Gender=Male, Lead Free="Lead Free", Mount="Through Hole", Number of Contacts=2, Number of Rows=1, Packaging=Bulk, Pitch=2mm, Radiation Hardening=No, RoHS Compliant=Yes, Termination=Solder
  EN1 EN2 EN3 EN4 EN5 EN6 J1 J2 J3: Component Type=Source
J10: library part CMP-2000-06374-1, "Male Header, Pitch 1.27 mm, 1 x 6 Position, Height 4 mm, Tail Length 2.3 mm, -40 to 105 degC, RoHS, Bulk", Manufacturer=Sullins, Package Description="Male Header, Pitch 1.27 mm, 1 x 6 Position, Height 4 mm, Tail Length 2.3 mm", Standard Package=1, Catalog Drawings=S9014ESeriesTop, Category=Connectors,Interconnects, Connector Type=Header,Unshrouded, Contact Finish=Gold, Contact Finish Thickness=Flash, Contact Mating Length="0.118\"(3.00mm)", Contact Type=MalePin, Datasheet URL=http://www.sullinscorp.com/drawings/71_GRPB___1VWVN-RC,_10957-C.pdf, Datasheet Version="Rev. C, 12/2008", Dynamic Catalog=GRPB, Family=RectangularConnectors-Headers,MalePins, Manufacturer URL=http://www.sullinscorp.com/, Mating Products="S9010E-06-ND / -CONNHEADER.050\"6POSR/APCB / S9008E-06-ND / -CONNHEADER.050\"6POSPCBGOLD / S9005E-06-ND / -CONNHEADER.050\"6POSSMDGOLD", Mounting Technology=ThroughHole, Mounting Type=ThroughHole, Number of Positions=6, Number of Positions Loaded=All, Number of Rows=1, Other Names=S9014E-06, Package Reference=GRPB061VWVN-RC, Packaging=Bulk, Pitch="0.050\"(1.27mm)", Termination=Solder
PS1 PS2 PS3 PS4 PS5 PS6: library part CMP-09306-49448123-1, "Module DC-DC 5VIN 1-OUT 15V 0.067A 1W 4-Pin SIP Tube", Case/Package=SIP, Current - Output 1=67mA, Isolation Voltage=1kV, Max Input Voltage=5.5V, Max Operating Temperature=85°C, Max Output Power=1W, Min Input Voltage=4.5V, Min Operating Temperature=-40°C, Nominal Input Voltage=5V, Nominal Output Voltage=15V, ComponentLink2Description="Datasheet URL", ComponentLink2URL=https://www.murata.com/products/productdata/8807029833758/kdc-mer1.pdf?1706585426000, Depth=6.15mm, Efficiency=87.5%, HelpURL=https://www.murata.com/products/productdata/8807029833758/kdc-mer1.pdf?1706585426000, Isolation=Isolated, Lead Free="Lead Free", Length=19.65mm, Max Input Voltage (DC)=5.5V, Max Output Current=67mA, Max Power Dissipation=1W, Min Input Voltage (DC)=4.5V, Mount="Through Hole", Number Of Outputs=1, Number of Pins=4, Output Current=67mA, Output Power=1W, Output Voltage=15V, Power Rating=1W, Radiation Hardening=No, REACH SVHC=No, RoHS=Compliant, Voltage - Output 1=15V
R1 R3 R5 R7 R9 R11: library part CMP-03412-013473-1, "RES SMD 75 OHM 0.5% 1/8W 0805", Manufacturer=Yageo, Package=RT0805, Power Rating=0.125W, Resistance=75Ω, Temperature="-55°C to +155°C", Temperature Coefficient="25 ppm/°C", Temperature Range High=+155°C, Temperature Range Low=-55°C, Tolerance=0.01, Voltage Rating=150V, Automotive=No, Category=Res, ComponentLink2Description=Datasheet, ComponentLink2URL=http://www.yageo.com/documents/recent/PYu-RT_1-to-0.01_RoHS_L_9.pdf, Composition="Thin Film", Device Class L1="Passive Components", Device Class L2=Resistors, Device Class L3="Chip SMD Resistors", Digikey Description="RES SMD 75 OHM 0.5% 1/8W 0805", Footprint Url=http://www.yageo.com/exep/pages/download/literatures/PYu-R_Mount_10.pdf, Height=0.6mm, Ipc Land Pattern Name=RESC200125X50, Lead Free=Yes, Manufacturer Part Number=RT0805DRD0775RL, Octopart=https://octopart.com/rt0805drd0775rl-yageo-1390155, RoHS=TRUE, Series=RT
R2 R4 R6 R8 R10 R12: library part CMP-03412-022310-1, "RES SMD 39K OHM 5% 1W 2512", Manufacturer=Yageo, Package=AC2512, Power Rating=1W, Resistance=39KΩ, Temperature="-55°C to +155°C", Temperature Range High=+155°C, Temperature Range Low=-55°C, Tolerance=0.05, Voltage Rating=200V, Automotive=Yes, Automotive Grade="Grade 0", Category=Res, ComponentLink2Description=Datasheet, ComponentLink2URL=http://www.yageo.com/documents/recent/PYu-AC_51_RoHS_L_6.pdf, Composition="Thick Film", Device Class L1="Passive Components", Device Class L2=Resistors, Device Class L3="Chip SMD Resistors", Digikey Description="RES SMD 39K OHM 5% 1W 2512", Footprint Url=http://www.yageo.com/exep/pages/download/literatures/PYu-R_Mount_10.pdf, Height=0.65mm, Ipc Land Pattern Name=RESC635310X55, Lead Free=Yes, Manufacturer Part Number=AC2512JK-0739KL, Octopart=https://octopart.com/ac2512jk-0739kl-yageo-71370377, RoHS=TRUE, Series=AC
R13 R14 R15 R16 R17 R18 R19 R20 R21 R22 R23 R24 R25 R26 R27 R28 R29 R30 R31 R32: library part CMP-03412-020008-1, "RES SMD 10K OHM 0.25% 1/10W 0603", Manufacturer=Yageo, Package=RT0603, Power Rating=0.1W, Resistance=10KΩ, Temperature="-55°C to +155°C", Temperature Coefficient="25 ppm/°C", Temperature Range High=+155°C, Temperature Range Low=-55°C, Tolerance=0.0025, Voltage Rating=75V, Automotive=No, Category=Res, ComponentLink2Description=Datasheet, ComponentLink2URL=http://www.yageo.com/documents/recent/PYu-RT_1-to-0.01_RoHS_L_9.pdf, Composition="Thin Film", Device Class L1="Passive Components", Device Class L2=Resistors, Device Class L3="Chip SMD Resistors", Digikey Description="RES SMD 10K OHM 0.25% 1/10W 0603", Footprint Url=http://www.yageo.com/exep/pages/download/literatures/PYu-R_Mount_10.pdf, Height=0.55mm, Ipc Land Pattern Name=RESC16080X45, Lead Free=Yes, Manufacturer Part Number=RT0603CRD0710KL, Mouser Description="Thin Film Resistors 1/10W 10K ohm .25% 25ppm", Octopart=https://octopart.com/rt0603crd0710kl-yageo-1262801, RoHS=TRUE, Series=RT
R33 R34: library part CMP-1666-00032-2, "RES Thick Film, 220kΩ, 1%, 0.1W, 100ppm/°C, 0603", Case Code (Imperial)=0603, Case Code (Metric)=1608, Max Operating Temperature=155°C, Max Power Dissipation=100mW, Min Operating Temperature=-55°C, Package Quantity=10, Resistance=220kR, Temperature Coefficient=100ppm/°C, Tolerance=1%, Voltage Rating=75V, Case/Package=0603, Composition="Thick Film", Contact Plating=Tin, Depth=0.85mm, Features="Automotive AEC-Q200", Height=0.45mm, Lead Free="Lead Free", Length=1.55mm, Military Standard=Not, Number of Terminations=2, Packaging="Tape and Reel", Power Rating=100mW, Radiation Hardening=No, Termination=SMD/SMT, Voltage Rating (DC)=75V, Weight=7.1E-05oz, Width=0.85mm
R35: library part CMP-03412-047726-1, "Anti-Sulfurated Chip Resistor Automotive Grade 150Ω 1% 0.125W ±100ppm/°C 0805", Case/Package=0805, Max Operating Temperature=155°C, Max Power Dissipation=125mW, Min Operating Temperature=-55°C, Resistance=150R, Resistor Type="Thick Film", Temperature Coefficient=100ppm/°C, Tolerance=1%, Features="Moisture Resistant", Height=0.024inch, Length=0.079inch, Number of Terminations=2, Packaging="Tape and Reel", RoHS Compliant=Yes, Series=AF, Width=0.049inch
R37 R38 R39 R40 R41 R42: library part CMP-2001-04475-2, "RES SMD 680 OHM 5% 1/8W 0805", Manufacturer=Yageo, Package=AC0805, Power Rating=1/8W, Resistance=680Ω, Temperature="-55°C to +155°C", Temperature Range High=+155°C, Temperature Range Low=-55°C, Tolerance=0.05, Voltage Rating=150V, Automotive=Yes, Automotive Grade="Grade 0", Category=Res, ComponentLink2Description=Datasheet, ComponentLink2URL=http://www.yageo.com/documents/recent/PYu-AC_51_RoHS_L_6.pdf, Composition="Thick Film", Device Class L1="Passive Components", Device Class L2=Resistors, Device Class L3="Chip SMD Resistors", Digikey Description="RES SMD 680 OHM 5% 1/8W 0805", Footprint Url=http://www.yageo.com/exep/pages/download/literatures/PYu-R_Mount_10.pdf, Height=0.6mm, Ipc Land Pattern Name=RESC200125X50, Lead Free=Yes, Manufacturer Part Number=AC0805JR-07680RL, Mouser Description="Thick Film Resistors - SMD 1/8W 680ohm 5% AEC-Q200", Octopart=https://octopart.com/ac0805jr-07680rl-yageo-26185516, RoHS=TRUE, Series=AC
U1 U2 U3 U4 U5 U6: library part CMP-04912-000034-1, "DGTL ISO 3KV 1CH GATE DRVR 8SOIC", Case/Package=SOIC, High Level Output Current=1.1A, Low Level Output Current=2.4A, Max Operating Temperature=125°C, Max Output Current=4.3A, Min Operating Temperature=-40°C, Working Voltage=990V, Approvals=CSA, Mount="Surface Mount", Number of Channels=1, Number of Pins=8, Packaging="Cut Tape", Propagation Delay=75ns, Pulse Width Distortion (PWD)=20ns, RoHS Compliant=Yes
U7: library part CMP-0440-00679-3, "Automotive Catalog Octal Buffers/Drivers With 3-State Outputs, DW0020A, LARGE T&R", F @ Nom Voltage(Max)(Mhz)=110, Generic Part Number=SN74AHCT244Q, ICC @ Nom Voltage(Max)(mA)=0.04, Manufacturer="Texas Instruments", Operating Temperature Range(C)="-40 to 125", Rating=Catalog, tpd @ Nom Voltage(Max)(ns)=9.5, Voltage(Nom)(V)=5, Bits(#)=8, Code_JEDEC=MS-013, DatasheetVersion=SGDS024, Input Type=TTL, Output Type=CMOS, PackageReference=DW0020A, PackageVersion=http://www.ti.com/lit/ml/mpds173a/mpds173a.pdf, VCC(Max)(V)=5.5, VCC(Min)(V)=4.5

## Free pads (board coordinates)
  oval 0x240 / inner oval 0x60 / far side oval 0x240 hole 125 unplated: 10(1325,4165) 11(6630,4165) 12(6640,1840) 13(1335,1840)
  oval 0x240 smd: 14(6925,2695)

## Via types
v1: diameter 24, hole 12, L1 to L4, 375 vias

## Nets (pads, with @x,y where several pads share a name; then routed paths per layer and width w, separated by ;. In a path a pad name is that pad's centre, name@x,y a point inside that pad or via, vN(x,y) a via of type N, cw(c..) or ccw(c..) an arc to the next point about the centre after c; other vN are vias at no path point)
5V: C1.1 EN1.1 EN2.1 EN3.1 EN4.1 EN5.1 EN6.1 J1.1 J2.1 R30.2 R32.2 R35.1 U7.20 | length 470.1
  L1 w12: v1(2095,2141) R35.1@2095,2179 ; R30.2@3930,2425 v1(4014,2425) ; U7.20@4406,2345 v1(4468,2345) ; v1(4515,2405) R32.2 4515.23,2373.23 4550.77,2373.23 v1(4551,2373) ; C1.1@4635,2340 v1(4678,2340)
  L1 w20: J1.1 2114,1861 J2.1
Buffer1: Buffer1.1 R19.1 R21.2 U1.2 U7.18 | length 3463
  L1 w8: 1927,2862 1969,2862 1979,2851 1979,2748 ; U7.18@4406,2245 4461,2245 4483,2223 R19.1@4567,2223
  L1 w10: R21.2@1829,2836 1798,2836 1798,2745 1836,2707 Buffer1.1 1979,2748 ; U1.2@1892,2909 1892,2866 1922,2866 1927,2862 ; v1(4095,2245) U7.18@4406,2245 ; R19.1@4567,2220 R19.1@4567,2223
  L4 w10: Buffer1.1 2314,2331 2424,2331 3364,2331 3517,2178 4028,2178 v1(4095,2245)
Buffer2: Buffer2.1 R20.1 R23.2 U2.2 U7.16 | length 2663.2
  L1 w10: U2.2@2798,2909 2798,2866 2765,2866 2734,2836 2704,2836 2704,2745 2742,2707 Buffer2.1 ; v1(4342,2145) 4350,2145 U7.16@4406,2145 ; v1(4500,2116) 4505,2116 4534,2145 R20.1@4567,2145
  L4 w10: Buffer2.1 2952,2599 3696,2599 3701,2594 3809,2594 4005,2398 4039,2398 4203,2234 4204,2235 4204,2146 4332,2018 4354,2018 4369,2034 4369,2118 ; v1(4342,2145) 4369,2118 ; v1(4500,2116) 4371,2116 4369,2118
Buffer3: Buffer3.1 R22.1 R25.2 U3.2 U7.14 | length 1721.3
  L1 w8: 3738,2862 3780,2862 3790,2851 3790,2748
  L1 w10: v1(3611.25,2825.83) 3629.83,2825.83 R25.2@3640,2836 ; U3.2@3703,2909 3703,2866 3733,2866 3738,2862 ; Buffer3.1 3790,2748 ; v1(4343,2045) 4350,2045 4406,2045 4462,2045 4472,2055 R22.1@4567,2055
  L4 w10: v1(3611.25,2825.83) Buffer3.1 3873,2707 4223,2357 4223,2164 v1(4343,2045)
Buffer4: Buffer4.1 R24.1 R27.2 U4.2 U7.12 | length 1372.1
  L1 w8: U7.12 4412.35,1951.4 4454.6,1951.4 4483,1923 4534,1923 ; 4567,1921 4570,1921 4599,1950 v1(4599,2003)
  L1 w10: 4534,1923 4536,1921 4567,1921 R24.1@4567,1890 ; U4.2@4609,2909 4609,2866 4576,2866 4545,2836 4545,2803 4566,2803 4655,2714 Buffer4.1
  L4 w10: v1(4599,2003) 4694.87,2098.87 4694.87,2287.95 4653.13,2329.7 4653.13,2705.13 Buffer4.1
Buffer5: Buffer5.1 R26.1 R29.2 U5.2 U7.9 | length 2473
  L1 w8: 3926,1825 3926,1902 3969,1945 U7.9@4024,1945
  L1 w10: R26.1@3895,1825 3926,1825 ; U7.9@4024,1945 4080,1945 4093,1957 v1(4342,1957) ; U5.2@5514,2909 5514,2866 5481,2866 5451,2836 5420,2836 5420,2745 5459,2707 Buffer5.1
  L4 w10: v1(4342,1957) 4691,1957 4690,1957 4702,1957 5452,2707 Buffer5.1
Buffer6: Buffer6.1 R28.1 R31.2 U6.2 U7.7 | length 3335
  L1 w8: 3926,2023 3947,2023 3969,2045 U7.7@4024,2045
  L1 w10: R28.1@3893,2000 3916,2023 3926,2023 ; U7.7@4024,2045 4080,2045 v1(4088,2045) ; v1(6322,2805) 6326,2809 6326,2836 6356,2836 6387,2866 6420,2866 U6.2@6420,2909
  L4 w10: v1(4088,2045) 4209,1924 5563,1924 5562,1923 6190,2551 6310,2551 Buffer6.1 6367,2805 v1(6322,2805)
DGND: C1.2 C14.2 C16.2 C20.2 C22.2 C26.2 C28.2 C32.2 C34.2 C38.2 C40.2 C44.2 C46.2 DS1.1 Enable1.1 Enable2.1 J1.2 J2.2 PS1.2 PS2.2 PS3.2 PS4.2 PS5.2 PS6.2 R13.2 R14.2 R15.2 R16.2 R17.2 R18.2 R19.2 R20.2 R21.1 R22.2 R23.1 R24.2 R25.1 R26.2 R27.1 R28.2 R29.1 R31.1 U1.3 U1.4 U2.3 U2.4 U3.3 U3.4 U4.3 U4.4 U5.3 U5.4 U6.3 U6.4 U7.10 U7.15 U7.17
  other v1: 4670,1805 3823,1856 4045,1860 3851,1890 4665,1890 1588,1896 1746,1896 1903,1896 2375,1896 2533,1896 2690,1896 3793,1896 4108,1896 5683,1896 5840,1896 5997,1896 6155,1896 6312,1896 6470,1896 2215,1950 3790,1965 4639,2001 4512,2013 1273,2053 1431,2053 1588,2053 1746,2053 1903,2053 2375,2053 2533,2053 2690,2053 3163,2053 3320,2053 3478,2053 3635,2053 4738,2053 4895,2053 5053,2053 5210,2053 5368,2053 5525,2053 5840,2053 5997,2053 6155,2053 6312,2053 6470,2053 6627,2053 3800,2060 4475,2085 4545,2095 4660.86,2114.14 2258.43,2165 4655,2190 4470,2195 3791,2205 1273,2211 1431,2211 1588,2211 1746,2211 1903,2211 2375,2211 2533,2211 2690,2211 4738,2211 4895,2211 5053,2211 5210,2211 5368,2211 5525,2211 5683,2211 5997,2211 6155,2211 6312,2211 6470,2211 6627,2211 4655.12,2241.65 3935,2250 2655,2255 3617,2278 3819,2323 2765,2360 1273,2368 1431,2368 1588,2368 1746,2368 1903,2368 2060,2368 2218,2368 2533,2368 2690,2368 4265,2368 4738,2368 4895,2368 5053,2368 5210,2368 5368,2368 5525,2368 5683,2368 5840,2368 6155,2368 6312,2368 6470,2368 6627,2368 1273,2526 1431,2526 1588,2526 1746,2526 1903,2526 2060,2526 2375,2526 2533,2526 2690,2526 2848,2526 3005,2526 3163,2526 3320,2526 3478,2526 3635,2526 3793,2526 4108,2526 4265,2526 4423,2526 4580,2526 4738,2526 4895,2526 5053,2526 5210,2526 5368,2526 5525,2526 5683,2526 5840,2526 5997,2526 6312,2526 6470,2526 6627,2526 1278,2568 1436,2568 1593,2568 1751,2568 1908,2568 2223,2568 2380,2568 2538,2568 2695,2568 2853,2568 3168,2568 3325,2568 3483,2568 3640,2568 3798,2568 3955,2568 4113,2568 4270,2568 4743,2568 4900,2568 5058,2568 5215,2568 5373,2568 5530,2568 5688,2568 5845,2568 6002,2568 6160,2568 6475,2568 6632,2568 3830,2650 1278,2726 1436,2726 1593,2726 1751,2726 2065,2726 2223,2726 2380,2726 2538,2726 3010,2726 3168,2726 3483,2726 3955,2726 4113,2726 4428,2726 4585,2726 4900,2726 5058,2726 5688,2726 5845,2726 6002,2726 6632,2726 3630.09,2740.09 4569,2749 1875,2765 2766,2769 5482,2769 6325,2769 3754,2797 6236,2804 2880,2865 6505,2870 1278,2883 2065,2883 2223,2883 2380,2883 2538,2883 3010,2883 3168,2883 3325,2883 3955,2883 4743,2883 4900,2883 5688,2883 5845,2883 6002,2883 6632,2883 1470,2885 4080,2890 5095,2905
Enable1: J3.1 R30.1 R33.1 U7.1 | length 1195.4
  L1 w10: R33.1@2900,2315 3421,2315 3457,2279 J3.1 3553,2279 3650,2376 3881,2376 3899,2358 3930,2358 3961,2358 3961,2352 3968,2345 U7.1@4024,2345
Enable2: J3.2 R32.1 R34.1 U7.19 | length 1543.2
  L1 w10: R34.1@3020,2400 3484,2400 J3.2 ; v1(4091,2302) 4342,2302 4350,2295 4406,2295 4462,2295 4474,2307 R32.1@4515,2307
  L4 w10: J3.2 4014,2379 v1(4091,2302)
Gate1: ISOL1-.1 J8.1 R2.2 U1.7 | length 886.4
  L1 w15: 1864,3174 1872,3174 1892,3154
  L1 w20: v1(1821,3174) 1864,3174 ; R2.2 1878,3557 1887,3566 J8.1 ; U1.7@1892,3125 1892,3154
  L4 w20: v1(1821,3174) 1821,3510 1887,3576 J8.1 1887,3793 ISOL1-.1
Gate2: Gate2.1 J9.1 R4.2 U2.7 | length 894.6
  L1 w15: 2769,3174 2778,3174 2798,3154
  L1 w20: v1(2726,3174) 2769,3174 ; R4.2 2783,3557 2792,3566 J9.1 ; U2.7@2798,3125 2798,3154
  L4 w20: v1(2726,3174) 2726,3509 2792,3576 J9.1 2792,3774 Gate2.1
Gate3: Gate3.1 J11.1 R6.2 U3.7 | length 897.5
  L1 w15: 3675,3174 3683,3174 3703,3154
  L1 w20: v1(3630,3174) 3675,3174 ; R6.2 3689,3557 3698,3566 J11.1 ; U3.7@3703,3125 3703,3154
  L4 w20: v1(3630,3174) 3630,3508 3698,3576 J11.1 3698,3774 Gate3.1
Gate4: Gate4.1 J12.1 R8.2 U4.7 | length 900.3
  L1 w15: 4580,3174 4589,3174 4609,3154
  L1 w20: v1(4533,3174) 4580,3174 ; R8.2 4594,3557 4603,3566 J12.1 ; U4.7@4609,3125 4609,3154
  L4 w20: v1(4533,3174) 4533,3505 4603,3576 J12.1 4603,3774 Gate4.1
Gate5: Gate5.1 J13.1 R10.2 U5.7 | length 898.2
  L1 w15: 5486,3174 5494,3174 5514,3154
  L1 w20: v1(5440,3174) 5486,3174 ; R10.2 5500,3557 5509,3566 J13.1 ; U5.7@5514,3125 5514,3154
  L4 w20: v1(5440,3174) 5440,3507 5509,3576 J13.1 5509,3774 Gate5.1
Gate6: Gate6.1 J14.1 R12.2 U6.7 | length 840.9
  L1 w15: v1@6391,3174 6400,3174 6420,3154
  L1 w20: v1(6385,3177) 6388,3174 v1@6391,3174 ; R12.2 6405,3557 6414,3566 J14.1 ; U6.7@6420,3125 6420,3154
  L4 w20: v1(6385,3177) 6414,3206 J14.1 6414,3774 Gate6.1
ISOL1+: C13.1 C15.1 C17.1 C18.1 D1.1 ISOL1+.1 PS1.6 R1.1 R37.1 U1.5 | length 1624
  L1 w15: C13.1@1435,3368 1479,3368 1500,3347 PS1.6@1541,3347 ; C15.1@1441,3242 1476,3242 1504,3270 1541,3270 ; C18.1@2012,3202 2047,3202 2070,3226
  L1 w20: C13.1@1435,3368 1435,3406 1432,3409 1432,3444 1432,3462 ; R1.1@1512,3570 1512,3526 1477,3526 1432,3481 1432,3462 ; 1541,3270 1541,3317 PS1.6@1541,3333 ; PS1.6@1541,3347 PS1.6@1541,3333 ; R37.1@1668,3565 1668,3527 1603,3462 1432,3462 ; U1.5@1992,3125 1992,3173 2012,3192 C18.1@2012,3202 ; 2070,3226 2070,3287 2024,3333 PS1.6@1541,3333
ISOL1-: C13.2 C15.2 C17.2 C18.2 D1.2 DS2.1 Gate1.1 J8.2 PS1.4 R1.2 U1.8 | length 1351.6
  L1 w12: C18.2@2012,3261 2014.5,3261 2033.2,3242.3 2037.7,3242.3 v1(2040,3240) ; C17.2@2024,3406 2033,3415 v1(2065,3415)
  L1 w15: 1403,3165 1403,3277 ; 1504,3693 1543,3733 1675,3733 ; 1549,3608 1559,3598 1559,3570 R1.2@1594,3570
  L1 w20: 1403,3165 1441,3165 ; 1403,3277 C13.2@1435,3309 ; D1.2@1432,3572 1432,3604 1442,3613 1461,3613 ; C15.2@1441,3183 1441,3165 ; 1504,3693 1504,3651 1461,3651 1461,3613 ; 1549,3608 1544,3613 1461,3613 ; 1675,3733 1675,3749 Gate1.1 ; U1.8@1842,3125 1834,3117 1541,3117 1471,3117 1441,3147 1441,3165
  other v1: 1405,3187 1563,3187 1720,3187 1720,3502 2035,3502 1405,3659 2035,3659 1405,3817 2035,3817 1405,3974 1563,3974 1720,3974 1878,3974 2035,3974 1563,4132 1720,4132 1878,4132 2035,4132
ISOL2+: C19.1 C21.1 C23.1 C24.1 D2.1 ISOL2+.1 PS2.6 R3.1 R38.1 U2.5 | length 1498
  L1 w12: v1(2914.24,3300.79) 2916.54,3303.09 2916.54,3309.77 2929,3322.23 C23.1@2929,3333 ; C21.1@2917,3202 v1(2949,3202)
  L1 w15: C19.1@2341,3368 2384,3368 2405,3347 PS2.6@2447,3347 ; C24.1@2346,3242 2381,3242 2410,3270 2447,3270
  L1 w20: C19.1@2341,3368 2341,3406 2338,3409 2338,3444 2338,3462 ; R3.1@2417,3570 2417,3526 2383,3526 2338,3481 2338,3462 ; 2447,3270 2447,3317 PS2.6@2447,3333 ; PS2.6@2447,3347 PS2.6@2447,3333 ; R38.1@2574,3565 2574,3527 2509,3462 2338,3462 ; U2.5@2898,3125 2898,3173 2917,3192 C21.1@2917,3202 ; C23.1@2929,3333 PS2.6@2447,3333
ISOL2-: C19.2 C21.2 C23.2 C24.2 D2.2 DS3.1 ISOL2-.1 J9.2 PS2.4 R3.2 U2.8 | length 1467.1
  L1 w10: 2943,3287 2955,3299 2970,3299
  L1 w12: C21.2@2917,3261 v1(2949,3261)
  L1 w15: v1@2309,3183 2309,3277 ; 2462,3599 2471,3608 2530,3608 ; 2970,3299 2989,3318 2989,3347
  L1 w20: v1@2309,3183 2346,3183 2346,3147 2377,3117 2447,3117 2740,3117 U2.8@2748,3125 ; 2309,3277 C19.2@2341,3309 ; D2.2@2338,3572 2338,3610 2363,3610 2366,3613 ; DS3.1@2409,3651 2366,3651 2366,3613 ; R3.2@2500,3570 2462,3570 2462,3599 2449,3613 2443,3613 2366,3613 ; 2530,3608 2671,3608 J9.2 ; C21.2@2917,3261 2917,3262 2943,3287 ; C23.2@2929,3406 2937.23,3414.23 2969.23,3414.23 v1(2970,3415) 2970,3413.92 2976,3407.92 2976,3367.76 2976,3359.49 2982.43,3353.06 2989,3347
  other v1: 2311,3187 2468,3187 2626,3187 2626,3502 2941,3502 2311,3659 2941,3659 2311,3817 2468,3817 2311,3974 2468,3974 2626,3974 2783,3974 2941,3974 2311,4132 2468,4132 2626,4132 2783,4132 2941,4132
ISOL3+: C25.1 C27.1 C29.1 C30.1 D3.1 ISOL3+.1 PS3.6 R5.1 R39.1 U3.5 | length 1206.9
  L1 w12: 3415,3462 v1(3446,3462) ; C29.1@3835,3323 3837,3325 v1(3880,3325)
  L1 w15: C25.1@3246,3368 3290,3368 3311,3347 PS3.6@3352,3347 ; C27.1@3252,3242 3287,3242 3315,3270 3352,3270 ; 3860,3197 3860,3297
  L1 w20: C25.1@3246,3368 3246,3406 3243,3409 3243,3444 3243,3462 ; R5.1@3323,3570 3323,3526 3288,3526 3243,3481 3243,3462 ; 3352,3270 3352,3317 PS3.6@3352,3347 ; R39.1@3479,3565 3479,3527 3415,3462 3243,3462 ; U3.5@3803,3125 3803,3173 3823,3192 C30.1@3823,3197 ; C30.1@3823,3202 C30.1@3823,3197 ; C29.1@3835,3333 3835,3323 3860,3297 ; 3860,3197 C30.1@3823,3197
ISOL3-: C25.2 C27.2 C29.2 C30.2 D3.2 DS5.1 ISOL3-.1 J11.2 PS3.4 R5.2 U3.8 | length 1475.2
  L1 w12: v1(3799,3241) C30.2@3823,3261 ; C29.2@3835,3406 v1(3866,3406)
  L1 w15: 3215,3165 3215,3277 ; 3360,3608 3370,3598 3370,3570 R5.2@3405,3570
  L1 w20: v1(3200,3150) 3215,3165 3226.72,3176.72 3245.72,3176.72 3252,3183 3252,3147 3282,3117 3352,3117 3645,3117 U3.8@3653,3125 ; 3215,3277 C25.2@3246,3309 ; D3.2@3243,3572 3243,3610 3272,3638 3272,3651 DS5.1@3315,3651 ; 3360,3608 3358,3608 DS5.1@3315,3651 ; ISOL3-.1 3457,3794 DS5.1@3315,3651 ; C30.2@3823,3261 3823,3266 3787,3301 3787,3406 C29.2@3835,3406
  other v1: 3374,3187 3531,3187 3531,3344 3689,3344 3531,3502 3846,3502 3216,3659 3846,3659 3216,3817 3374,3817 3216,3974 3374,3974 3531,3974 3689,3974 3846,3974 3216,4132 3374,4132 3531,4132 3689,4132 3846,4132
ISOL4+: C31.1 C33.1 C35.1 C36.1 D4.1 ISOL4+.1 PS4.6 R7.1 R40.1 U4.5 | length 1519
  L1 w15: C31.1@4152,3368 4195,3368 4216,3347 PS4.6@4258,3347 ; C33.1@4157,3242 4192,3242 4221,3270 4258,3270 ; C36.1@4728,3202 4763,3202 4787,3226
  L1 w20: C31.1@4152,3368 4152,3406 4149,3409 4149,3444 4149,3481 4185,3481 4228,3525 ; R7.1@4228,3570 4228,3525 ; 4258,3270 4258,3317 PS4.6@4258,3333 ; PS4.6@4258,3347 PS4.6@4258,3333 ; R40.1@4385,3565 4385,3527 4382,3525 4228,3525 ; U4.5@4709,3125 4709,3173 4728,3192 C36.1@4728,3202 ; 4787,3226 4787,3287 4740,3333 PS4.6@4258,3333
ISOL4-: C31.2 C33.2 C35.2 C36.2 D4.2 DS7.1 ISOL4-.1 J12.2 PS4.4 R7.2 U4.8 | length 1289.4
  L1 w12: C36.2@4728,3261 v1(4752,3241) ; C35.2@4740,3406 4741,3405 v1(4780,3405)
  L1 w15: 4120,3165 4114.71,3165 4108.57,3171.14 v1(4106.14,3171.14) 4106.14,3263.14 4120,3277 ; 4273,3594 4288,3608 4341,3608
  L1 w20: 4120,3165 4157,3165 ; 4120,3277 C31.2@4152,3309 ; D4.2@4149,3572 4149,3610 4177,3638 ; C33.2@4157,3183 4157,3165 ; DS7.1@4220,3651 4177,3651 4177,3638 ; R7.2@4311,3570 4273,3570 4273,3594 4254,3613 4202,3613 4177,3638 ; 4341,3608 4482,3608 J12.2 ; U4.8@4559,3125 4551,3117 4258,3117 4188,3117 4157,3147 4157,3165
  other v1: 4279,3187 4437,3187 4437,3502 4752,3502 4122,3659 4752,3659 4122,3817 4279,3817 4122,3974 4279,3974 4437,3974 4594,3974 4752,3974 4122,4132 4279,4132 4437,4132 4594,4132 4752,4132
ISOL5+: C37.1 C39.1 C41.1 C42.1 D5.1 ISOL5+.1 PS5.6 R9.1 R41.1 U5.5 | length 1386.9
  L1 w12: v1(5630,3306) C41.1@5646,3333 ; C42.1@5634,3202 v1(5665,3202)
  L1 w15: C37.1@5057,3368 5101,3368 5122,3347 PS5.6@5163,3347 ; C39.1@5063,3242 5098,3242 5126,3270 5163,3270
  L1 w20: C37.1@5057,3368 5057,3406 5054,3409 5054,3444 5054,3481 5091,3481 5134,3525 ; R9.1@5134,3570 5134,3525 ; 5163,3270 5163,3317 PS5.6@5163,3333 ; PS5.6@5163,3347 PS5.6@5163,3333 ; R41.1@5290,3565 5290,3527 5288,3525 5134,3525 ; U5.5@5614,3125 5614,3173 5634,3192 C42.1@5634,3202 ; C41.1@5646,3333 PS5.6@5163,3333
ISOL5-: C37.2 C39.2 C41.2 C42.2 D5.2 DS8.1 ISOL5-.1 J13.2 PS5.4 R9.2 U5.8 | length 1528.6
  L1 w10: 5659,3287 5671,3299 5686,3299
  L1 w12: C42.2@5634,3261 v1(5665,3261) ; C41.2@5646,3406 v1(5677,3406)
  L1 w15: 5026,3165 5026,3166.57 v1(5005.57,3187) 5005.57,3256.57 5026,3277 ; 5171,3608 5181,3598 5181,3570 R9.2@5216,3570 ; 5686,3299 5705,3318 5705,3347
  L1 w20: 5026,3165 5063,3165 ; 5026,3277 C37.2@5057,3309 ; D5.2@5054,3572 5054,3604 5064,3613 5083,3613 ; C39.2@5063,3183 5063,3165 ; 5171,3608 5166,3613 5083,3613 ; ISOL5-.1 5268,3794 5126,3651 5083,3651 5083,3613 ; U5.8@5464,3125 5456,3117 5163,3117 5093,3117 5063,3147 5063,3165 ; C42.2@5634,3261 5634,3262 5659,3287 ; C41.2@5646,3406 5693,3406 5693,3359 5705,3347
  other v1: 5185,3187 5342,3187 5342,3502 5657,3502 5028,3659 5657,3659 5028,3817 5185,3817 5028,3974 5185,3974 5342,3974 5500,3974 5657,3974 5028,4132 5185,4132 5342,4132 5500,4132 5657,4132
ISOL6+: C43.1 C45.1 C47.1 C48.1 D6.1 ISOL6+.1 PS6.6 R11.1 R42.1 U6.5 | length 1386.6
  L1 w12: v1(6535,3306) C47.1@6551,3333 ; C48.1@6539,3202 v1(6571,3202)
  L1 w15: C43.1@5963,3368 6006,3368 6027,3347 PS6.6@6069,3347 ; C45.1@5968,3242 6003,3242 6032,3270 6069,3270
  L1 w20: C43.1@5963,3368 5963,3406 5960,3409 5960,3444 5960,3481 5996,3481 6039,3525 ; R11.1@6039,3570 6039,3525 ; 6069,3270 6069,3317 PS6.6@6069,3333 ; PS6.6@6069,3347 PS6.6@6069,3333 ; R42.1@6196,3565 6196,3527 6193,3525 6039,3525 ; U6.5@6520,3125 6520,3173 6539,3192 C48.1@6539,3202 ; C47.1@6551,3333 PS6.6@6069,3333
ISOL6-: C43.2 C45.2 C47.2 C48.2 D6.2 DS9.1 ISOL6-.1 J14.2 PS6.4 R11.2 U6.8 | length 1524.8
  L1 w10: 6565,3287 6577,3299 6592,3299
  L1 w12: C48.2@6539,3261 v1(6571,3261)
  L1 w15: 5931,3165 5925.71,3165 5919.57,3171.14 v1(5917.14,3171.14) 5917.14,3206.22 5905,3218.36 5905,3251 5931,3277 ; 6085,3599 6093,3608 6153,3608 ; 6592,3299 6611,3318 6611,3347
  L1 w20: 5931,3165 5968,3165 ; 5931,3277 C43.2@5963,3309 ; D6.2@5960,3572 5960,3610 5985,3610 5988,3613 ; C45.2@5968,3183 5968,3165 ; DS9.1@6031,3651 5988,3651 5988,3613 ; R11.2@6122,3570 6085,3570 6085,3599 6071,3613 6065,3613 5988,3613 ; 6153,3608 6293,3608 J14.2 ; U6.8@6370,3125 6362,3117 6069,3117 5999,3117 5968,3147 5968,3165 ; C48.2@6539,3261 6539,3262 6565,3287 ; C47.2@6551,3406 6560.12,3415.12 6591.04,3415.12 6597.78,3421.86 v1(6598.86,3421.86) 6598.86,3379.74 6598,3378.87 6598,3359 6611,3347
  other v1: 6091,3187 6248,3187 6248,3502 6563,3502 5933,3659 6563,3659 5933,3817 6091,3817 5933,3974 6091,3974 6248,3974 6405,3974 6563,3974 5933,4132 6091,4132 6248,4132 6405,4132
NetC14_1: C14.1 C16.1 EN1.2 PS1.1 U1.1 | length 721.1
  L1 w15: 1594,2873 1824,2873 U1.1@1840,2890 ; U1.1@1842,2892 U1.1@1840,2890 ; 1865,2865 U1.1@1840,2890
  L1 w20: C14.1@1425,2827 1472,2827 1483,2817 1541,2817 1594,2870 1594,2873 ; U1.1@1842,2892 U1.1@1842,2909 ; 1865,2865 1865,2853 C16.1@1890,2828
  L4 w20: PS1.1@1541,2817 1541,2764 1542,2763 EN1.2
NetC20_1: C20.1 C22.1 EN2.2 PS2.1 U2.1 | length 1032.4
  L1 w20: C20.1@2331,2827 2378,2827 2388,2817 2447,2817 2584,2817 2675,2909 U2.1@2748,2909 ; C22.1@2795,2828 2795,2791 v1(2799,2787)
  L4 w20: PS2.1@2447,2817 PS2.1@2447,2791 ; EN2.2 2448,2763 2447,2764 PS2.1@2447,2791 ; v1(2799,2787) 2784,2802 2458,2802 PS2.1@2447,2791
NetC26_1: C26.1 C28.1 EN3.2 PS3.1 U3.1 | length 721.1
  L1 w15: 3405,2873 3635,2873 U3.1@3651,2890 ; U3.1@3653,2892 U3.1@3651,2890 ; 3676,2865 U3.1@3651,2890
  L1 w20: C26.1@3236,2827 3283,2827 3294,2817 3352,2817 3405,2870 3405,2873 ; U3.1@3653,2892 U3.1@3653,2909 ; 3676,2865 3676,2853 C28.1@3701,2828
  L4 w20: PS3.1@3352,2817 3352,2764 3353,2763 EN3.2
NetC32_1: C32.1 C34.1 EN4.2 PS4.1 U4.1 | length 1357.5
  L1 w15: 4311,2873 4540,2873 U4.1@4559,2892
  L1 w20: C32.1@4142,2827 4189,2827 4199,2817 4258,2817 4258,2821 4311,2873 ; EN4.2 4312,2597 4632,2597 4717,2681 4717,2733 4660,2790 4641,2790 4606,2824 C34.1@4606,2828 ; U4.1@4559,2892 U4.1@4559,2909
  L4 w20: PS4.1@4258,2817 4258,2764 4259,2763 EN4.2
NetC38_1: C38.1 C40.1 EN5.2 PS5.1 U5.1 | length 1078
  L1 w20: C38.1@5047,2827 5095,2827 5105,2817 5163,2817 5216,2817 5308,2909 U5.1@5464,2909 ; C40.1@5512,2828 5512,2791 v1(5539,2791)
  L4 w20: EN5.2 5165,2763 5163,2764 5163,2817 5512,2817 v1(5539,2791)
NetC44_1: C44.1 C46.1 EN6.2 PS6.1 U6.1 | length 1097.9